# Altium PCB eth_witch.PcbDoc (part 1 of 2)
Units mm, origin at the board's own origin, x right, y up, seen from the top; angles counter-clockwise.
Board outline 80 x 66.5 mm, 4 copper layers (Top Layer, Layer 2, Layer 1, Bottom Layer), stack 1.01 mm thick; 112 components, 94 nets, 442 pads, 468 vias.
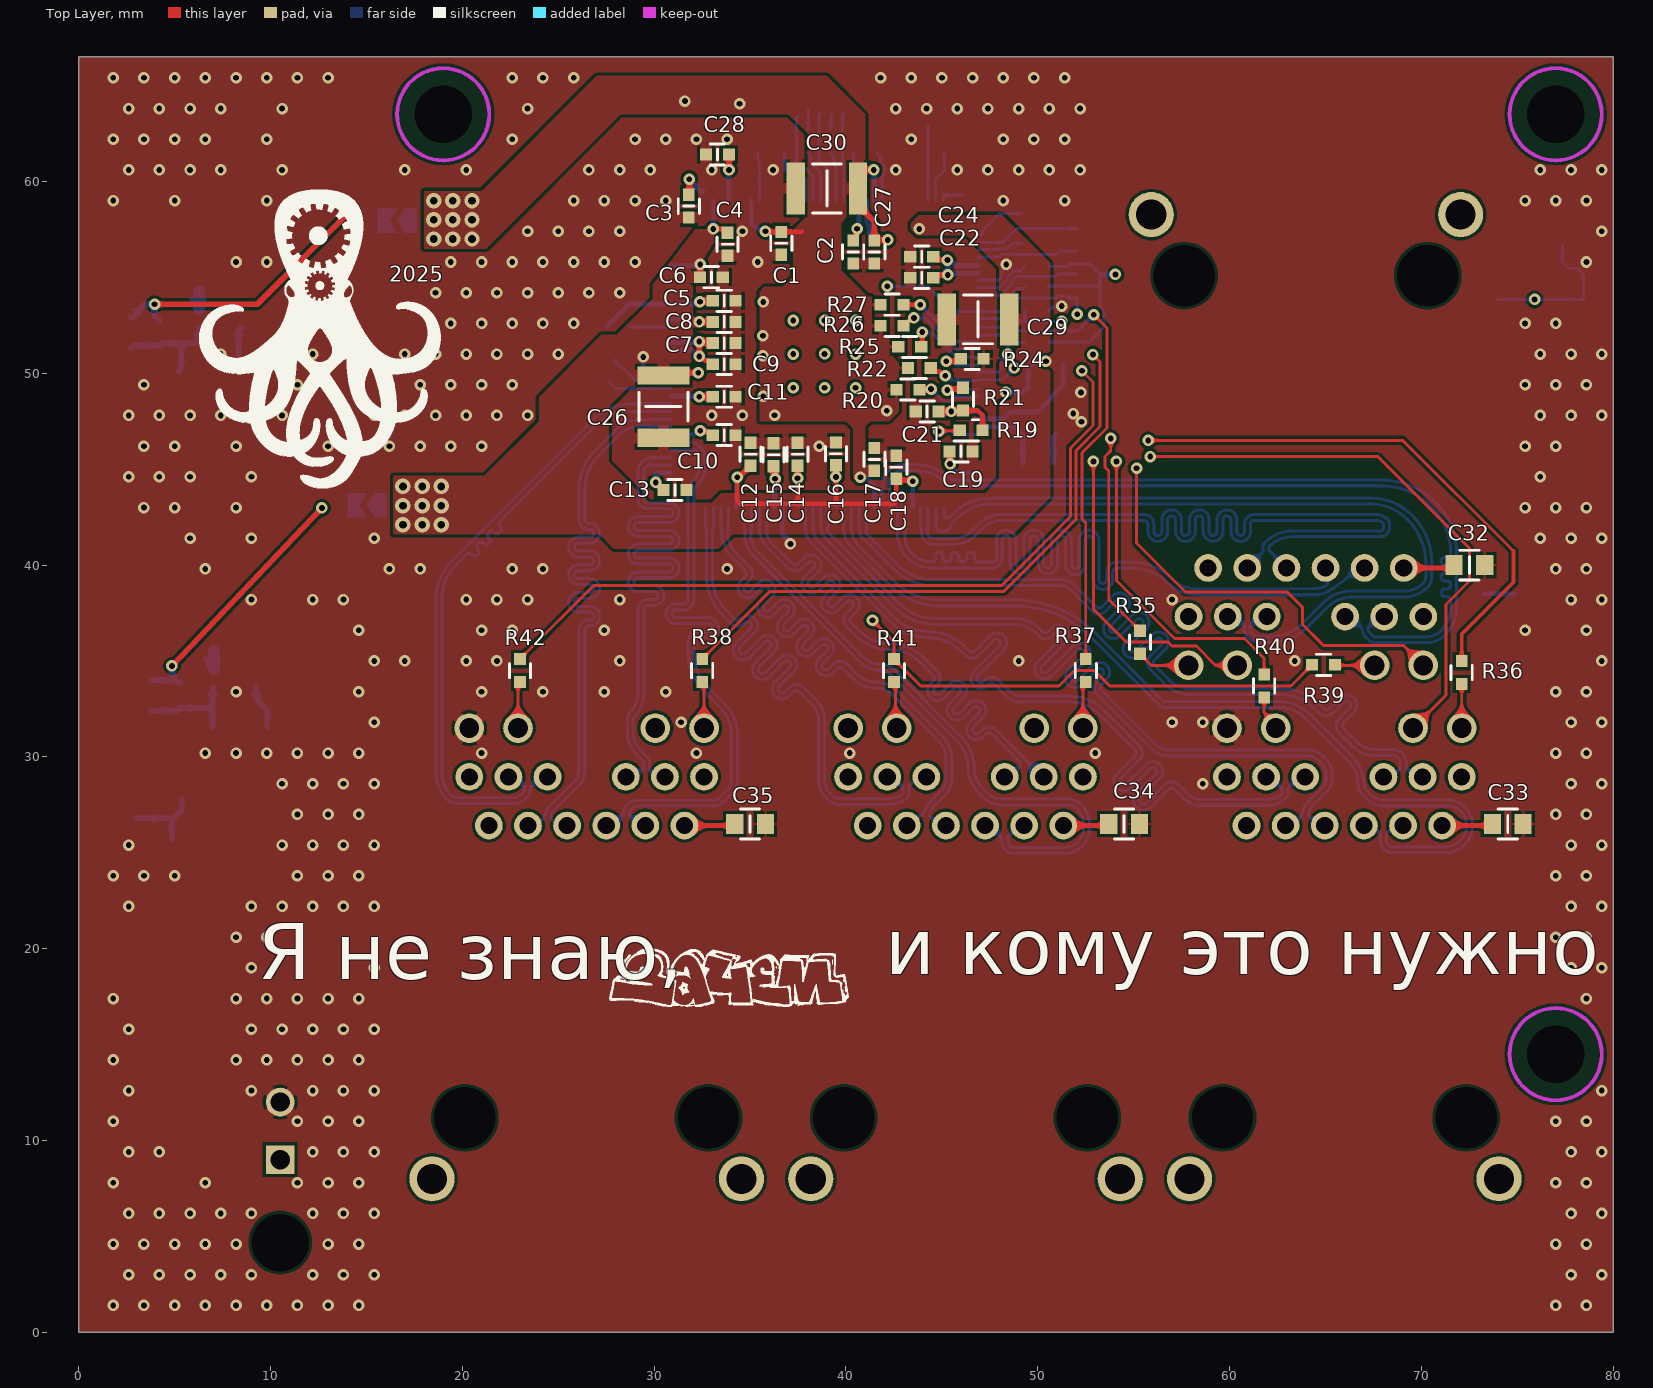
[diagram p0: Top Layer view]
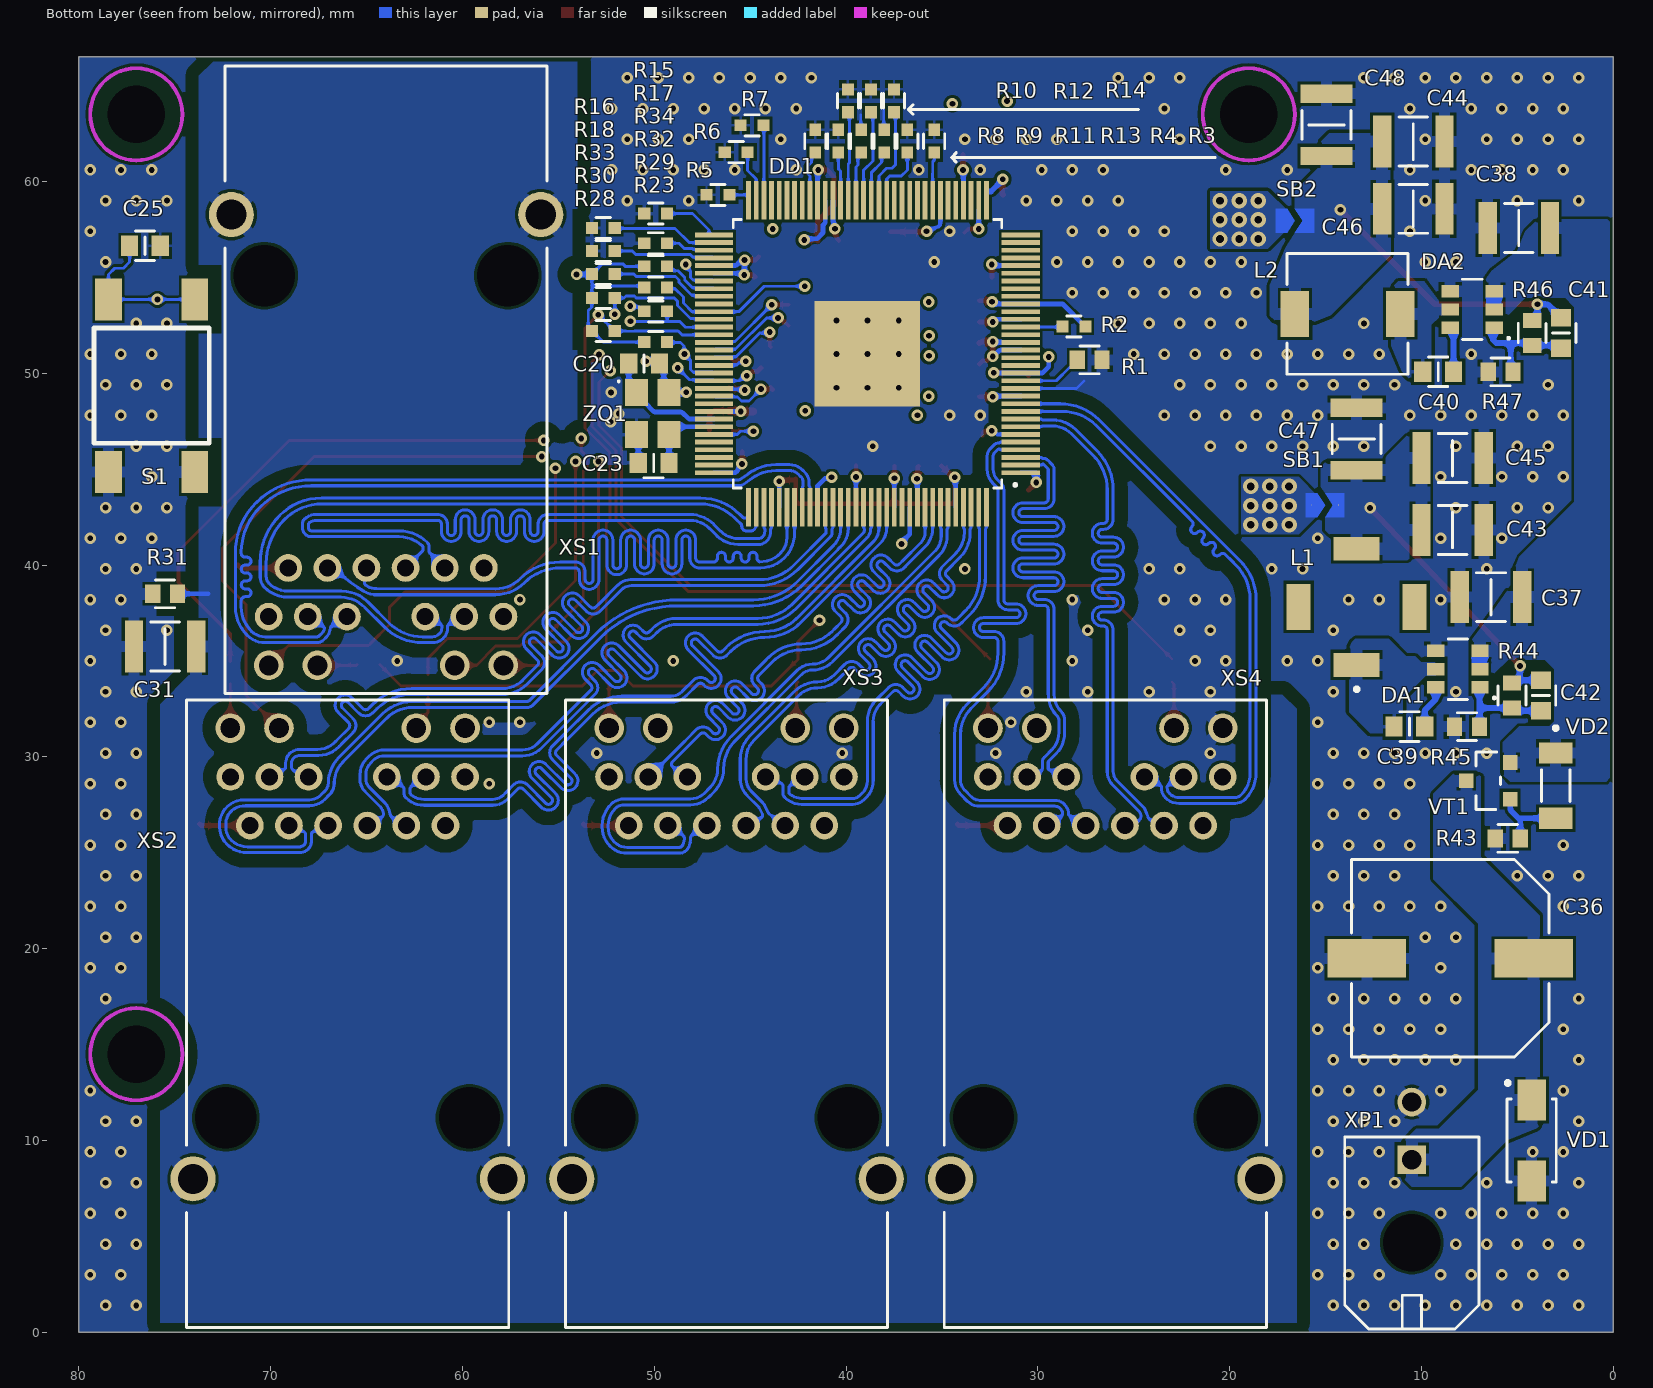
[diagram p1: Bottom Layer view, seen from below]
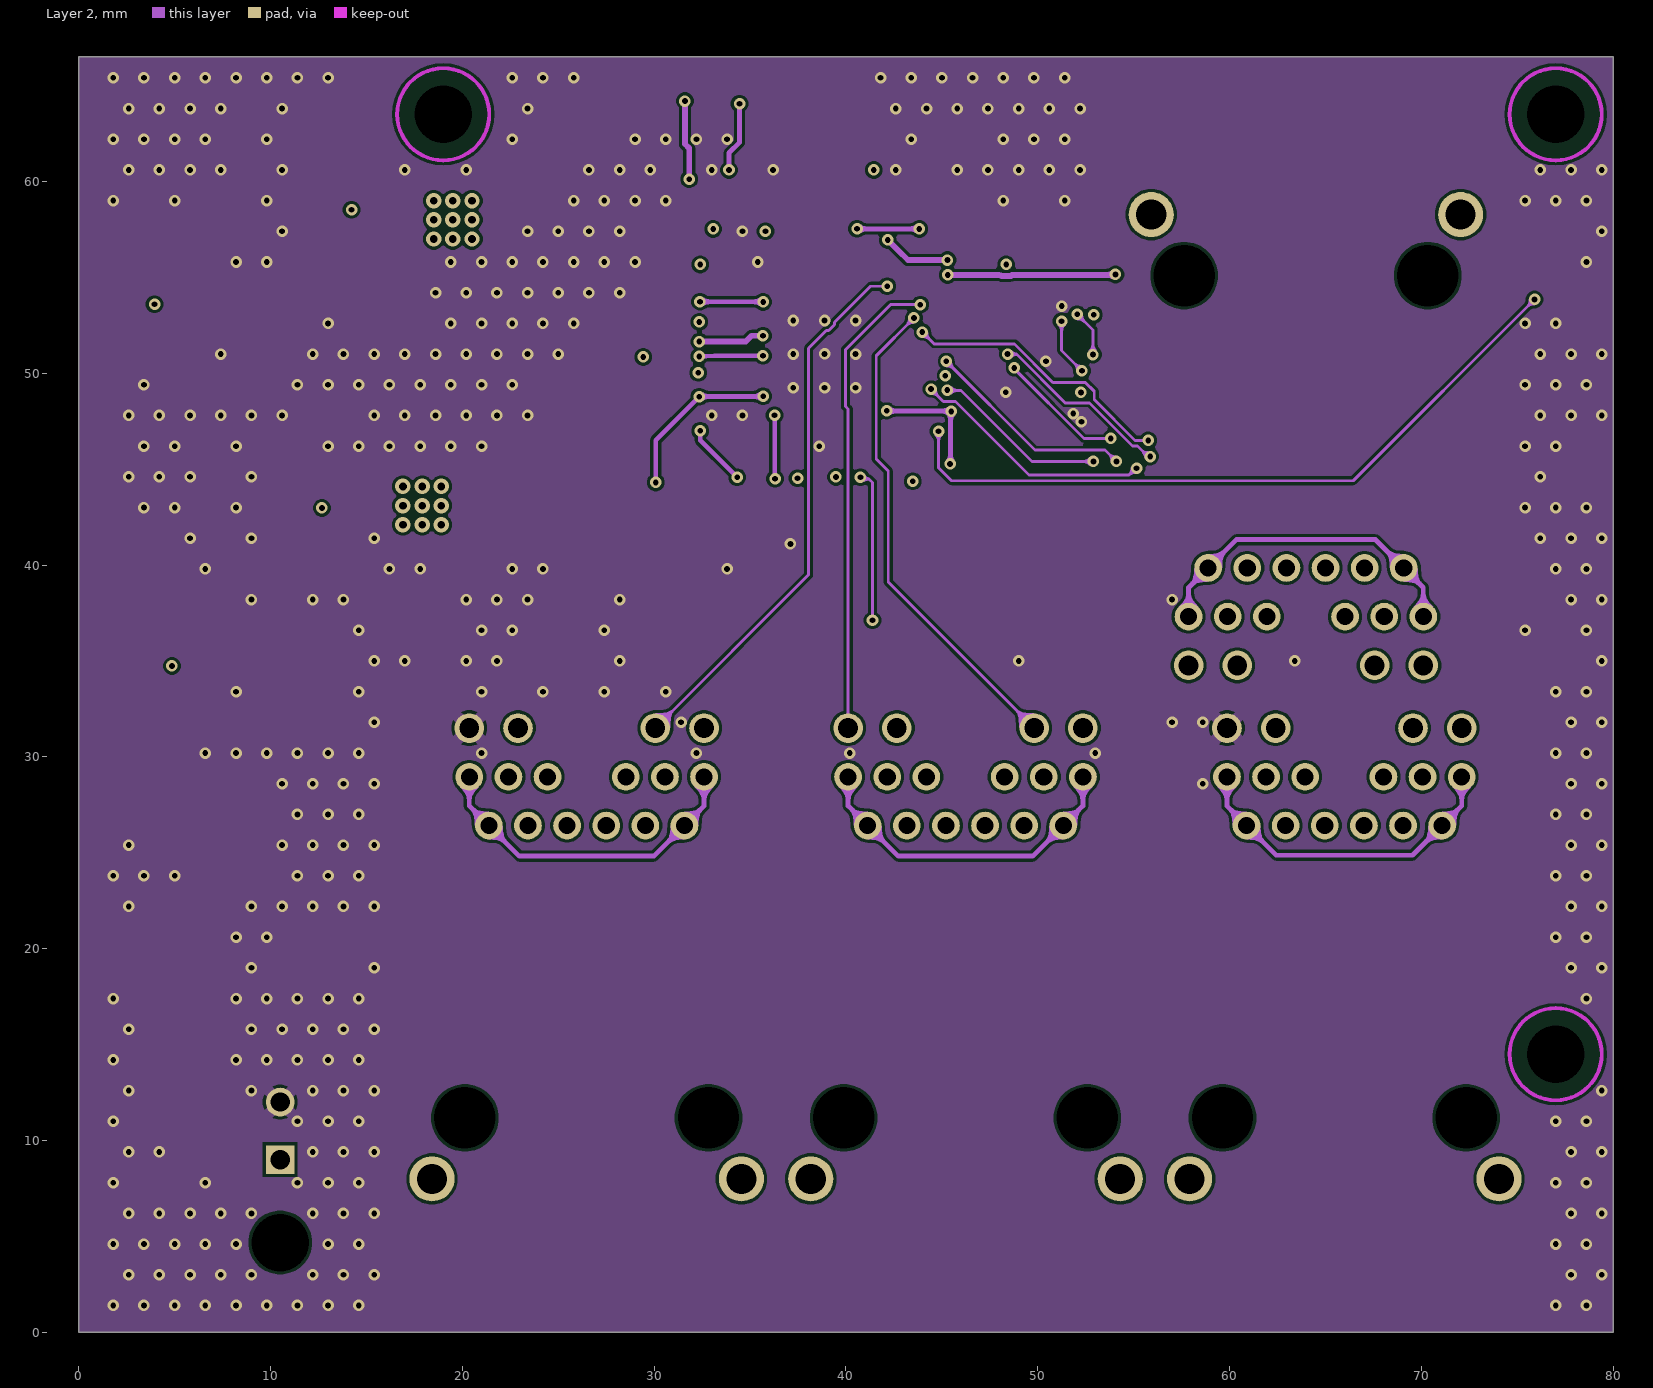
[diagram p2: Layer 2]
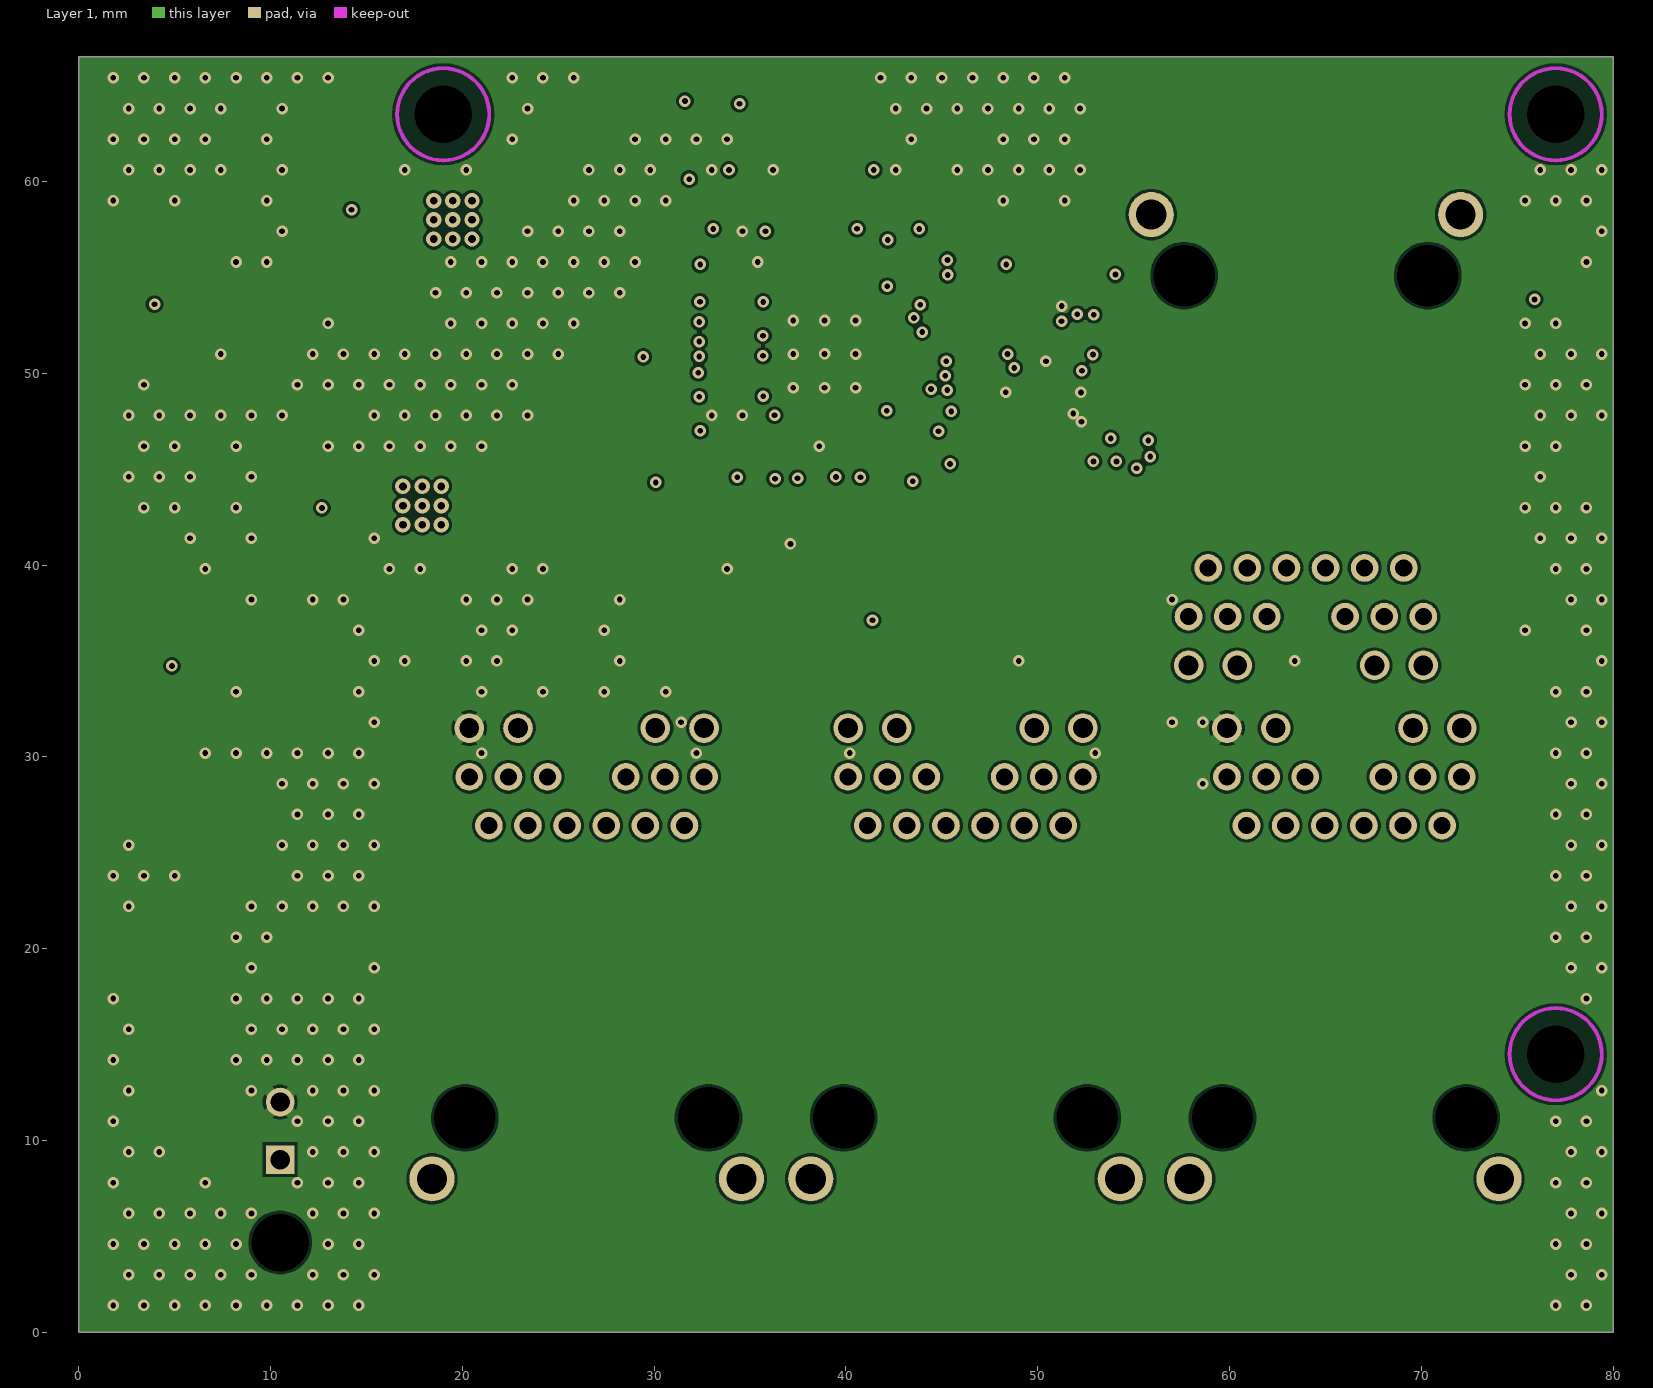
[diagram p3: Layer 1]
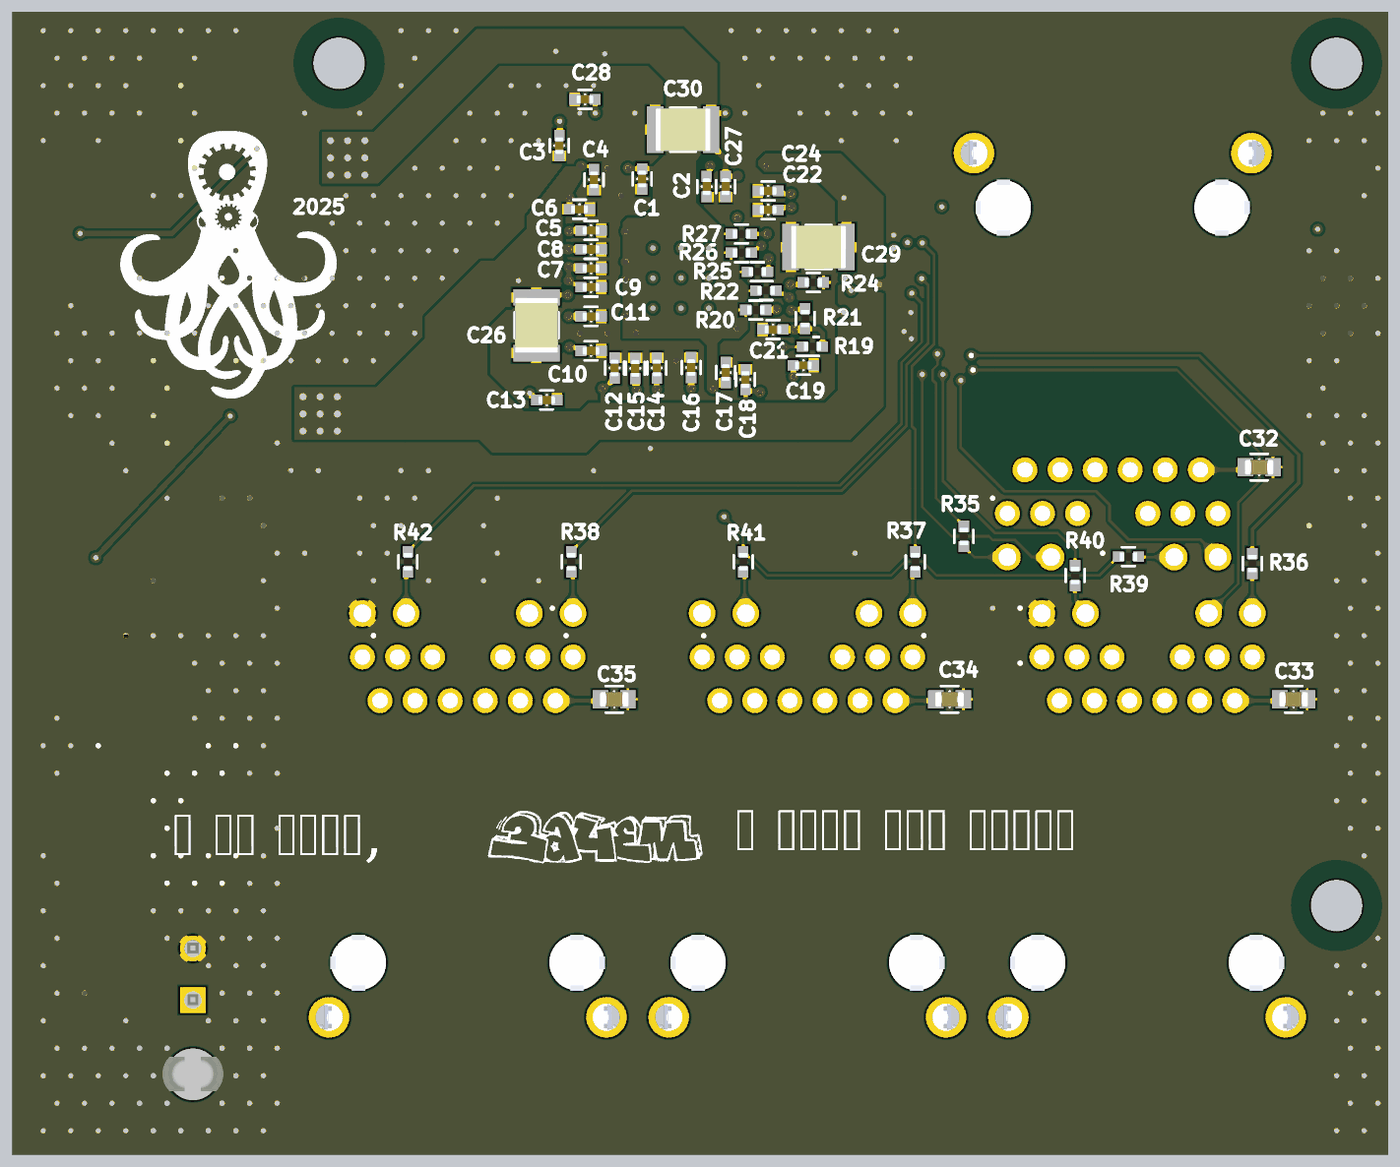
[diagram p5: 3D render of the assembled board from above, using the file's embedded part models]
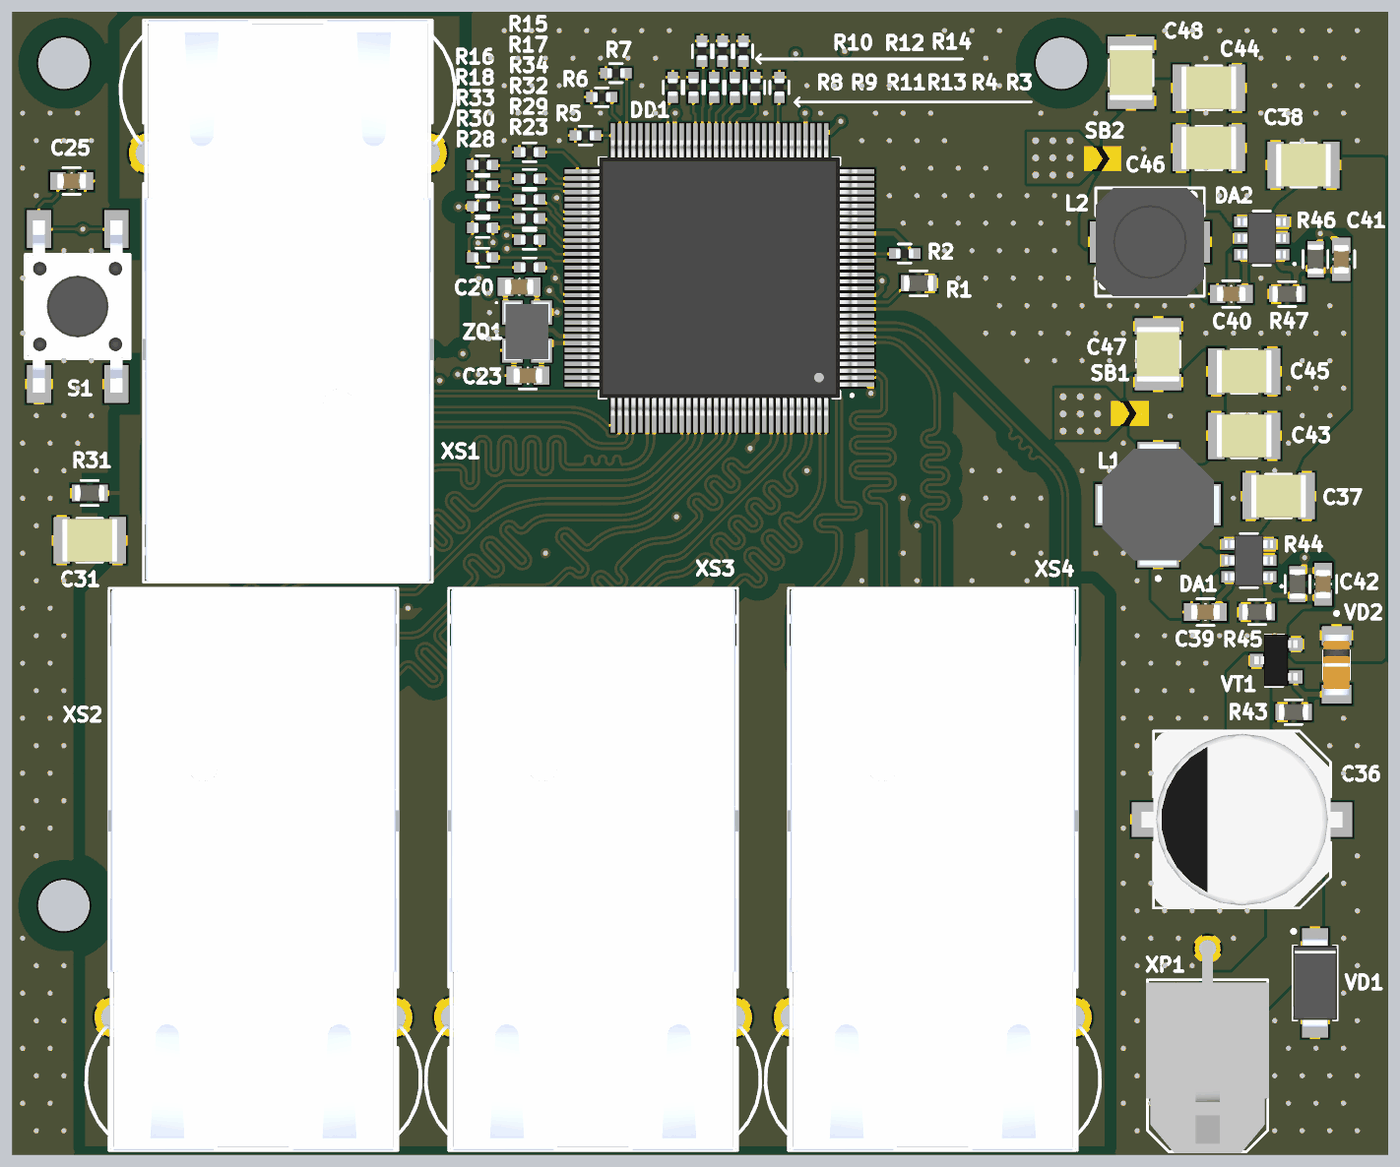
[diagram p6: 3D render of the assembled board from below, using the file's embedded part models]

## Layer stack, top to bottom
Top Solder: solder mask 0.0102, Solder Resist, Dk 3.5
Top Layer: signal copper 0.0175
Dielectric 2: prepreg 0.115, PP-006, Dk 4.2
Layer 2: signal copper 0.0175
Dielectric 1: dielectric 0.71, FR-4, Dk 4.6
Layer 1: signal copper 0.0175
Dielectric 3: prepreg 0.115, PP-006, Dk 4.2
Bottom Layer: signal copper 0.0175
Board Layer Stack Bottom Solder: solder mask 0.0102, Solder Resist, Dk 3.5

## Board outline
0,0 0,66.5 80,66.5 80,0

## Design rules (kind name [scope] priority, off if disabled: settings)
Clearance Clearance_1 [(InNetClass('Port 0') or InNetClass('Port 1') or InNetClass('Port 2') or InNetClass('Port 3') or InNet('GND_ETH')) and not HasFootprint('JK00136NL')] p1: gap=0.15 ignorepadtopadclearanceinfootprint=FALSE except(0.7: Arc-Poly Track-Poly SMDPad-Poly THPad-Poly Via-Poly Fill-Poly Poly-Poly)
Clearance [All] p2: gap=0.15 ignorepadtopadclearanceinfootprint=FALSE
ComponentClearance [All] p1: gap=0.01 collisioncheckmode=3 verticalgap=0.254 showdistances=FALSE
DiffPairsRouting [All] p1: maxlimit=0.4 minlimit=0.1 mostfreqgap=0.4 toplayer_maxgap=0.16 toplayer_prefgap=0.15 toplayer_minwidth=0.157 toplayer_maxwidth=0.158 toplayer_prefwidth=0.158 bottomlayer_maxgap=0.16 bottomlayer_prefgap=0.15 bottomlayer_minwidth=0.157 bottomlayer_maxwidth=0.158 bottomlayer_prefwidth=0.158 impedanceprofiledriven=TRUE impedanceprofileid={DB7D71F1-6594-4B91-9FCC-BB8C32429FCE} impedanceprofilevalue=100.000000 maxuncoupledlength=12.7
HoleSize [All] p1: absolutevalues=TRUE maxlimit=3.2 minlimit=0.3 maxpercent=80.000 minpercent=20.000
MinimumSolderMaskSliver [All] p1: minsoldermaskwidth=0.01
PolygonConnect PolygonConnect_5 [HasFootprint('LQFP128_14x14_exposed_pad')] p1: connectstyle=Direct reliefconductorwidth=0.254 reliefentries=4 polygonreliefangle="90 Angle" airgapwidth=0.254
PolygonConnect PolygonConnect_4 [HasFootprint('0402R') or HasFootprint('0603C') or HasFootprint('X322525MOB4SI')] p2: connectstyle=Relief reliefconductorwidth=0.15 reliefentries=4 polygonreliefangle="90 Angle" conductorbypadedge=TRUE mindistance=0.381 enablemindistance=FALSE airgapwidth=0.15
PolygonConnect PolygonConnect_3 [InNet('NetC39_2') vs HasFootprint('TSOT26')] p3: connectstyle=Direct reliefconductorwidth=0.254 reliefentries=4 polygonreliefangle="90 Angle" airgapwidth=0.254
PolygonConnect PolygonConnect_2 [HasFootprint('0805SB')] p4: connectstyle=Direct reliefconductorwidth=0.254 reliefentries=4 polygonreliefangle="90 Angle" airgapwidth=0.254
PolygonConnect PolygonConnect_1 [InNet('NetC38_2') vs HasFootprint('TSOT26')] p5: connectstyle=Direct reliefconductorwidth=0.254 reliefentries=4 polygonreliefangle="90 Angle" airgapwidth=0.254
PolygonConnect [All] p6: thpad.connectstyle=Relief thpad.reliefconductorwidth=0.6 thpad.reliefentries=4 thpad.polygonreliefangle="90 Angle" thpad.airgapwidth=0.15 thpad.conductorbypadedge=TRUE thpad.mindistance=0.381 thpad.enablemindistance=FALSE smdpad.connectstyle=Relief smdpad.reliefconductorwidth=0.6 smdpad.reliefentries=4 smdpad.polygonreliefangle="90 Angle" smdpad.airgapwidth=0.15 smdpad.conductorbypadedge=TRUE smdpad.mindistance=0.381 smdpad.enablemindistance=FALSE via.connectstyle=Direct via.reliefconductorwidth=0.6 via.reliefentries=4 via.polygonreliefangle="90 Angle" via.airgapwidth=0.15
RoutingVias [All] p1: holewidth=0.3 width=0.6 viastyle="Through Hole" minholewidth=0.3 minwidth=0.6 maxholewidth=0.7 maxwidth=1
SilkToSilkClearance [All] p1: silktosilkclearance=0.05
SilkToSolderMaskClearance [IsPad] p1: minsilkscreentomaskgap=0.1 clearancetoexposedcopper=TRUE
SolderMaskExpansion SolderMaskExpansion_2 [HoleDiameter = 0.4] p1: expansion=0.102 istentingtop=TRUE
SolderMaskExpansion SolderMaskExpansion_1 [HoleDiameter = 0.3] p2: expansion=0.102 istentingtop=TRUE
SolderMaskExpansion [All] p3: expansion=0.102 istentingtop=FALSE
SupplyNets "Schematic Supply Nets_4" [InNet('GND_ETH')] p1: voltage=0.000
SupplyNets "Schematic Supply Nets_3" [InNet('+1.1')] p2: voltage=0.000
SupplyNets "Schematic Supply Nets_2" [InNet('+12')] p3: voltage=0.000
SupplyNets "Schematic Supply Nets_1" [InNet('GND')] p4: voltage=0.000
SupplyNets "Schematic Supply Nets" [InNet('+3.3')] p5: voltage=0.000
Width [All] p1: maxlimit=0.6 minlimit=0.15 preferedwidth=0.15
24 further rules are at their usual default settings.

## Classes and differential pairs
net class Power: +1.1 +3.3
net class "Port 3": P3A_N P3A_P P3B_N P3B_P P3C_N P3C_P P3D_N P3D_P
net class "Port 2": P2A_N P2A_P P2B_N P2B_P P2C_N P2C_P P2D_N P2D_P
net class "Port 1": P1A_N P1A_P P1B_N P1B_P P1C_N P1C_P P1D_N P1D_P
net class "Port 0": P0A_N P0A_P P0B_N P0B_P P0C_N P0C_P P0D_N P0D_P
component class ETH_SWITCH: C1 C2 C3 C4 C5 C6 C7 C8 C9 C10 C11 C12 C13 C14 C15 C16 C17 C18 C19 C20 C21 C22 C23 C24 C25 C26 C27 C28 C29 C30 C31 C32 C33 C34 C35 DD1 R1 R2 R3 R4 R5 R6 R7 R8 R9 R10 R11 R12 R13 R14 R15 R16 R17 R18 R19 R20 R21 R22 R23 R24 R25 R26 R27 R28 R29 R30 R31 R32 R33 R34 R35 R36 R37 R38 R39 R40 R41 R42 S1 XS1 XS2 XS3 XS4 ZQ1
component class dc-dc: C36 C37 C38 C39 C40 C41 C42 C43 C44 C45 C46 C47 C48 DA1 DA2 L1 L2 R43 R44 R45 R46 R47 SB1 SB2 VD1 VD2 VT1 XP1
differential pair P3D: +P3D_P -P3D_N
differential pair P3C: +P3C_P -P3C_N
differential pair P3B: +P3B_P -P3B_N
differential pair P3A: +P3A_P -P3A_N
differential pair P2D: +P2D_P -P2D_N
differential pair P2C: +P2C_P -P2C_N
differential pair P2B: +P2B_P -P2B_N
differential pair P2A: +P2A_P -P2A_N
differential pair P1D: +P1D_P -P1D_N
differential pair P1C: +P1C_P -P1C_N
differential pair P1B: +P1B_P -P1B_N
differential pair P1A: +P1A_P -P1A_N
differential pair P0D: +P0D_P -P0D_N
differential pair P0C: +P0C_P -P0C_N
differential pair P0B: +P0B_P -P0B_N
differential pair P0A: +P0A_P -P0A_N

## Components (designator, comment, footprint, x,y, rotation, side; value= is the part's Value field where it differs from the comment)
C1 "Capacitor" 0402C 36.625,56.775 r90 top value="0,1 мк"
C2 "Capacitor" 0402C 40.375,56.325 r90 top value="0,1 мк"
C3 "Capacitor" 0402C 31.805,58.71 r90 top value="0,1 мк"
C4 "Capacitor" 0402C 33.825,56.725 r90 top value="0,1 мк"
C5 "Capacitor" 0402C 33.65,53.775 r180 top value="0,1 мк"
C6 "Capacitor" 0402C 32.98,55.01 r180 top value="0,1 мк"
C7 "Capacitor" 0402C 33.65,51.575 r180 top value="0,1 мк"
C8 "Capacitor" 0402C 33.65,52.675 r180 top value="0,1 мк"
C9 "Capacitor" 0402C 33.65,50.475 r180 top value="0,1 мк"
C10 "Capacitor" 0402C 33.65,46.775 r180 top value="0,1 мк"
C11 "Capacitor" 0402C 33.65,48.775 r180 top value="0,1 мк"
C12 "Capacitor" 0402C 35.025,45.775 r270 top value="0,1 мк"
C13 "Capacitor" 0402C 31.08,43.91 r180 top value="0,1 мк"
C14 "Capacitor" 0402C 37.475,45.775 r270 top value="0,1 мк"
C15 "Capacitor" 0402C 36.225,45.75 r270 top value="0,1 мк"
C16 "Capacitor" 0402C 39.475,45.8 r270 top value="0,1 мк"
C17 "Capacitor" 0402C 41.48,45.51 r270 top value="0,1 мк"
C18 "Capacitor" 0402C 42.625,45.1 r270 top value="0,1 мк"
C19 "Capacitor" 0402C 46,45.925 r180 top value="0,1 мк"
C20 "GRM1885C1H220J" 0603C 50.525,50.5 r0 bottom value=22п
C21 "Capacitor" 0402C 44.23,48.01 r0 top value="0,1 мк"
C22 "Capacitor" 0402C 43.95,54.975 r0 top value="0,1 мк"
C23 "GRM1885C1H220J" 0603C 50.025,45.325 r0 bottom value=22п
C24 "Capacitor" 0402C 43.95,56.075 r0 top value="0,1 мк"
C25 "Capacitor" 0603C 76.55,56.65 r0 bottom value="0,1 мк"
C26 "Capacitor" 1210C 30.48,48.26 r90 top value="10 мк"
C27 "Capacitor" 0402C 41.475,56.325 r90 top value="0,1 мк"
C28 "Capacitor" 0402C 33.3,61.4 r0 top value="0,1 мк"
C29 "Capacitor" 1210C 46.88,52.81 r0 top value="10 мк"
C30 "Capacitor" 1210C 39.005,59.635 r0 top value="10 мк"
C31 "Capacitor" 1210C 75.5,35.75 r180 bottom value=1н
C32 "Capacitor" 0603C 72.5,40 r0 top value="0,1 мк"
C33 "Capacitor" 0603C 74.5,26.5 r0 top value="0,1 мк"
C34 "Capacitor" 0603C 54.5,26.5 r0 top value="0,1 мк"
C35 "Capacitor" 0603C 35,26.5 r0 top value="0,1 мк"
C36 "Capacitor_polar" ECAP_SMD_10,3x10,3 8.5,19.5 r0 bottom value="470 мк"
C37 "Capacitor" 1210C 6.375,38.325 r180 bottom value="10 мк"
C38 "Capacitor" 1210C 4.925,57.575 r180 bottom value="10 мк"
C39 "Capacitor" 0603C 10.625,31.575 r0 bottom value="0,1 мк"
C40 "Capacitor" 0603C 9.125,50.075 r0 bottom value="0,1 мк"
C41 "Capacitor" 0603C 2.725,52.1 r90 bottom value="100 п"
C42 "Capacitor" 0603C 3.775,33.2 r90 bottom value="100 п"
C43 "Capacitor" 1210C 8.375,41.825 r0 bottom value="22 мк"
C44 "Capacitor" 1210C 10.425,62.075 r0 bottom value="22 мк"
C45 "Capacitor" 1210C 8.375,45.575 r0 bottom value="22 мк"
C46 "Capacitor" 1210C 10.425,58.575 r0 bottom value="22 мк"
C47 "Capacitor" 1210C 13.375,46.575 r270 bottom value="22 мк"
C48 "Capacitor" 1210C 14.95,62.95 r270 bottom value="22 мк"
DA1 "AP63200" TSOT26 8.1,34.575 r90 bottom
DA2 "AP63200" TSOT26 7.35,53.325 r90 bottom
DD1 "RTL8367RB-VB" LQFP128_14x14_exposed_pad 38.88,51.01 r0 bottom
L1 "CDRH6D12NP-2R2NC" CDRH6D12 13.375,37.825 r270 bottom value="2,2 мк"
L2 "B82472G6472M" B82462G4 13.85,53.1 r0 bottom value="4,7 мк"
R1 "RC0603FR-072K49L" 0603R 27.3,50.7 r0 bottom value="2,49 к"
R2 "Resistor" 0402R 28.117,52.432 r0 bottom value="4,7 к"
R3 "Resistor" 0402R 35.4,62.1 r90 bottom value="1,0 к"
R4 "Resistor" 0402R 36.8,62.1 r90 bottom value="1,0 к"
R5 "Resistor" 0402R 46.675,59.3 r180 bottom value="1,0 к"
R6 "Resistor" 0402R 45.725,61.525 r180 bottom value="1,0 к"
R7 "Resistor" 0402R 44.9,62.925 r180 bottom value="1,0 к"
R8 "Resistor" 0402R 41.6,62.1 r270 bottom value="1,0 к"
R9 "Resistor" 0402R 40.4,62.1 r270 bottom value="1,0 к"
R10 "Resistor" 0402R 39.9,64.2 r270 bottom value="1,0 к"
R11 "Resistor" 0402R 39.2,62.1 r270 bottom value="1,0 к"
R12 "Resistor" 0402R 38.7,64.2 r270 bottom value="1,0 к"
R13 "Resistor" 0402R 38,62.1 r270 bottom value="1,0 к"
R14 "Resistor" 0402R 37.5,64.2 r270 bottom value="1,0 к"
R15 "Resistor" 0402R 49.925,58.325 r180 bottom value="1,0 к"
R16 "Resistor" 0402R 52.65,57.575 r180 bottom value="1,0 к"
R17 "Resistor" 0402R 49.925,56.775 r180 bottom value="1,0 к"
R18 "Resistor" 0402R 52.65,56.375 r180 bottom value="1,0 к"
R19 "Resistor" 0402R 46.525,47.025 r0 top value="4,7 к"
R20 "Resistor" 0402R 43.228,49.146 r180 top value="4,7 к"
R21 "Resistor" 0402R 46.1,48.65 r270 top value="4,7 к"
R22 "Resistor" 0402R 43.825,50.275 r180 top value="4,7 к"
R23 "Resistor" 0402R 49.925,51.625 r0 bottom value="4,7 к"
R24 "Resistor" 0402R 46.575,50.75 r180 top value="4,7 к"
R25 "Resistor" 0402R 43.325,51.375 r180 top value="4,7 к"
R26 "Resistor" 0402R 42.4,52.475 r180 top value="4,7 к"
R27 "Resistor" 0402R 42.4,53.575 r180 top value="4,7 к"
R28 "Resistor" 0402R 52.65,52.2 r0 bottom value="4,7 к"
R29 "Resistor" 0402R 49.925,53.225 r180 bottom value="4,7 к"
R30 "Resistor" 0402R 52.65,53.925 r0 bottom value="4,7 к"
R31 "Resistor" 0603R 75.5,38.5 r180 bottom value="1,0 М"
R32 "Resistor" 0402R 49.925,54.475 r0 bottom value="4,7 к"
R33 "Resistor" 0402R 52.65,55.175 r0 bottom value="4,7 к"
R34 "Resistor" 0402R 49.925,55.575 r0 bottom value="4,7 к"
R35 "Resistor" 0402R 55.325,35.975 r270 top value=470
R36 "Resistor" 0402R 72.101,34.396 r270 top value=470
R37 "Resistor" 0402R 52.5,34.5 r270 top value=470
R38 "Resistor" 0402R 32.5,34.5 r270 top value=470
R39 "Resistor" 0402R 64.9,34.8 r0 top value=470
R40 "Resistor" 0402R 61.8,33.7 r270 top value=470
R41 "Resistor" 0402R 42.5,34.5 r270 top value=470
R42 "Resistor" 0402R 23,34.5 r270 top value=470
R43 "Resistor" 0603R 5.5,25.75 r180 bottom value="10 к"
R44 "Resistor" 0603R 5.275,33.2 r90 bottom value=750
R45 "Resistor" 0603R 7.625,31.575 r180 bottom value="2,0 к"
R46 "Resistor" 0603R 4.225,52.1 r90 bottom value="5,6 к"
R47 "Resistor" 0603R 5.875,50.075 r180 bottom value="1,8 к"
S1 "Tact_button" Button_SMD_6x6 76.2,49.35 r270 bottom
SB1 "SB" 0805SB 16.025,42.5 r180 bottom net-tie
SB2 "SB" 0805SB 17.6,57.325 r180 bottom net-tie
VD1 "SMAJ12A" SMA 4.25,10 r270 bottom value="12 В"
VD2 "BZV55-B10" mini_MELF_3.5mm 3,28.5 r270 bottom value="10 В"
VT1 "AO3401A" SOT23-3 6.5,28.75 r0 bottom
XP1 "430450200" MOLEX_MICRO-FIT_430450200 10.5,4.68 r180 bottom
XS1 "JK0-0136NL" JK00136NL 63.98,49.51 r270 bottom
XS2 "JK0-0136NL" JK00136NL 65.98,16.76 r90 bottom
XS3 "JK0-0136NL" JK00136NL 46.23,16.76 r90 bottom
XS4 "JK0-0136NL" JK00136NL 26.48,16.76 r90 bottom
ZQ1 "X322525MOB4SI" X322525MOB4SI 50.075,47.9 r270 bottom value="25 МГц"

## Footprints (in the part's own frame and the unit in brackets; to place one, negate y for a bottom-side part, rotate by r counter-clockwise, add the part's x,y. Pads: shape width x height; smd on the part's side, far side on the other; paste and mask are expansions set on the pad)
0402C [mm]
  rect 0.635x0.61 smd: 1(-0.597,0) 2(0.597,0)
  silkscreen extent -0.38,-0.55 0.38,0.55, body extent -0.51,-0.25 0.51,0.25, height 0.71
0402R [mm]
  rect 0.635x0.61 smd: 1(-0.597,0) 2(0.597,0)
  silkscreen extent -0.38,-0.55 0.38,0.55, body extent -0.5,-0.25 0.5,0.25, height 0.4
0603C [mm] "Chip Resistor, 2-Leads, Body 1,40x0,80mm, IPC Medium Density"
  rect 0.9x1.05 smd: 1(-0.8,0) 2(0.8,0)
  silkscreen extent 0,-0.45 0,0.45, body extent -0.85,-0.45 0.85,0.45, height 0.9
0603R [mm] "Chip Resistor, 2-Leads, Body 1.60x0.85mm, IPC Medium Density"
  rect 0.8x0.95 smd: 1(-0.65,0) 2(0.65,0)
  silkscreen extent -0.5,-0.72 0.5,0.72, body extent -0.87,-0.47 0.88,0.48, height 0.9
0805SB [mm]
  round 0.025 smd: 1(0.3,0.625) 2(1.7,0.625)
  Top Layer region: 1,0 1.4,0.625 1,1.25 2,1.25 2,0 2,0
  Top Layer region: 0.6,1.25 1,0.625 0.6,0 0,0 0,1.25
  body extent 0.4,0 1.7,1.25, height 0.3
1210C [mm]
  rect 0.954x2.706 smd paste+0: 1(-1.625,0) 2(1.625,0)
  silkscreen extent -0.75,-1.28 0.75,1.28, body extent -2.35,-1.6 2.35,1.6, height 0.25
B82462G4 [mm]
  rect 1.5x2.4 smd: 1(-2.75,0) 2(2.75,0)
  silkscreen extent -3.15,-3.15 3.15,3.15, body extent -3.15,-3.15 3.15,3.15, height 3
Button_SMD_6x6 [mm]
  rect 2.2x1.4 smd: 1(-4.5,-2.25) 1(-4.5,2.25) 2(4.5,-2.25) 2(4.5,2.25)
  silkscreen extent -3,-3 3,3, body extent -5,-3 5,3, height 7.1
CDRH6D12 [mm]
  rect 1.25x2.4 smd: 1(3.025,0) 3(-3.025,0)
  rect 2.4x1.25 smd: 2(0,3.025) 4(0,-3.025)
  silkscreen extent 4.2,-0.1 4.4,0.1, body extent -3.52,-3.52 3.52,3.52, height 1.6
ECAP_SMD_10,3x10,3 [mm]
  rect 4.1x2 smd: 1(-4.35,0) 2(4.35,0)
  silkscreen extent -5.15,-5.15 5.15,5.15, body extent -5.85,-5.15 5.85,5.15, height 10.21
JK00136NL [mm]
  round 2.355 hole 1.57: 0(-8.76,-8.065) 0(-8.76,8.065)
  round 1.446 hole 0.89: 1(9.66,-5.1) 2(9.66,-3.06) 3(9.66,-1.02) 4(9.66,1.02) 5(9.66,3.06) 6(9.66,5.1) 7(12.2,-6.12) 8(12.2,-4.08) 9(12.2,-2.04) 10(12.2,2.04) 11(12.2,4.08) 12(12.2,6.12)
  round 1.545 hole 1.03: 13(14.74,-6.12) 14(14.74,-3.58) 15(14.74,3.58) 16(14.74,6.12)
  round 0 hole 3.2 unplated mask+1.7: 17(-5.58,6.35) 18(-5.58,-6.35)
  silkscreen extent -16.51,-8.39 16.2,8.39, body extent -16.51,-9.84 16.18,9.84, height 15.04
LQFP128_14x14_exposed_pad [mm]
  rect 2x0.25 smd: 1(-8,6.2) 2(-8,5.8) 3(-8,5.4) 4(-8,5) 5(-8,4.6) 6(-8,4.2) 7(-8,3.8) 8(-8,3.4) 9(-8,3) 10(-8,2.6) 11(-8,2.2) 12(-8,1.8) 13(-8,1.4) 14(-8,1) 15(-8,0.6) 16(-8,0.2) 17(-8,-0.2) 18(-8,-0.6) 19(-8,-1) 20(-8,-1.4) 21(-8,-1.8) 22(-8,-2.2) 23(-8,-2.6) 24(-8,-3) 25(-8,-3.4) 26(-8,-3.8) 27(-8,-4.2) 28(-8,-4.6) 29(-8,-5) 30(-8,-5.4) 31(-8,-5.8) 32(-8,-6.2) 65(8,-6.2) 66(8,-5.8) 67(8,-5.4) 68(8,-5) 69(8,-4.6) 70(8,-4.2) 71(8,-3.8) 72(8,-3.4) 73(8,-3) 74(8,-2.6) 75(8,-2.2) 76(8,-1.8) 77(8,-1.4) 78(8,-1) 79(8,-0.6) 80(8,-0.2) 81(8,0.2) 82(8,0.6) 83(8,1) 84(8,1.4) 85(8,1.8) 86(8,2.2) 87(8,2.6) 88(8,3) 89(8,3.4) 90(8,3.8) 91(8,4.2) 92(8,4.6) 93(8,5) 94(8,5.4) 95(8,5.8) 96(8,6.2)
  rect 0.25x2 smd: 33(-6.2,-8) 34(-5.8,-8) 35(-5.4,-8) 36(-5,-8) 37(-4.6,-8) 38(-4.2,-8) 39(-3.8,-8) 40(-3.4,-8) 41(-3,-8) 42(-2.6,-8) 43(-2.2,-8) 44(-1.8,-8) 45(-1.4,-8) 46(-1,-8) 47(-0.6,-8) 48(-0.2,-8) 49(0.2,-8) 50(0.6,-8) 51(1,-8) 52(1.4,-8) 53(1.8,-8) 54(2.2,-8) 55(2.6,-8) 56(3,-8) 57(3.4,-8) 58(3.8,-8) 59(4.2,-8) 60(4.6,-8) 61(5,-8) 62(5.4,-8) 63(5.8,-8) 64(6.2,-8) 97(6.2,8) 98(5.8,8) 99(5.4,8) 100(5,8) 101(4.6,8) 102(4.2,8) 103(3.8,8) 104(3.4,8) 105(3,8) 106(2.6,8) 107(2.2,8) 108(1.8,8) 109(1.4,8) 110(1,8) 111(0.6,8) 112(0.2,8) 113(-0.2,8) 114(-0.6,8) 115(-1,8) 116(-1.4,8) 117(-1.8,8) 118(-2.2,8) 119(-2.6,8) 120(-3,8) 121(-3.4,8) 122(-3.8,8) 123(-4.2,8) 124(-4.6,8) 125(-5,8) 126(-5.4,8) 127(-5.8,8) 128(-6.2,8)
  rect 5.5x5.5 smd: 129(0,0)
  silkscreen extent -7.78,-7 7,7, body extent -8,-8 8,8, height 1.6
mini_MELF_3.5mm [mm]
  rect 1.11x1.73 smd: 1(1.705,0) 2(-1.705,0)
  silkscreen extent -3.1,-0.75 0.83,0.75, body extent -1.75,-0.8 1.75,0.8, height 1.59
MOLEX_MICRO-FIT_430450200 [mm] "Molex MicroFit 3.0 2 pin connector"
  round 0 hole 3 unplated mask+1.6: 0(0,0)
  rect 1.5x1.5 hole 1: 1(0,4.32)
  round 1.5 hole 1: 2(0,7.32)
  silkscreen extent -3.5,-4.5 3.5,5.5, body extent -3.57,-4.57 3.58,7.67, height 8.93
SMA [mm]
  rect 2.12x1.5 smd: 1(2.115,0) 2(-2.115,0)
  silkscreen extent -3.1,-1.35 2.16,1.28, body extent -2.57,-1.28 2.57,1.28, height 2.5
SOT23-3 [mil]
  rect 30x30 smd: 1(-44.29,37.4) 2(-44.29,-37.6) 3(45.71,-0.1)
  silkscreen extent -25,-59 26,59, body extent -48,-60 50,59, height 41
TSOT26 [mm]
  rect 0.645x0.9 smd: 1(-0.95,-1.15) 2(0,-1.15) 3(0.95,-1.15) 4(0.95,1.15) 5(0,1.15) 6(-0.95,1.15)
  silkscreen extent -1.58,-1.95 1.57,0.5, body extent -1.5,-1.4 1.5,1.4, height 1.01
X322525MOB4SI [mm]
  rect 1.4x1.2 smd: 1(-1.1,-0.85) 2(1.1,-0.85) 3(1.1,0.85) 4(-1.1,0.85)
  silkscreen extent -1.73,-1.82 -1.63,-1.73, body extent -1.68,-1.33 1.68,1.33, height 0.9

## Part data
C1 C2 C3 C4 C5 C6 C7 C8 C9 C10 C11 C12 C13 C14 C15 C16 C17 C18 C19 C21 C22 C24 C27 C28: library part Capacitor_0,1u_10_16V_X7R_0603C, "Конденсатор 0402C ёмкостью 0,1 мк 10%, 16 В, X7R", Capacity (nF)=100, Dielectric=X7R, Tolerance=10%, Voltage (V)=16, Part Number=Capacitor_0,1u_10_16V_X7R_0603C, Автор=rreali
C20 C23: "Конденсатор 0603C ёмкостью 22п 5%, 50 В, NP0", Capacity (nF)=0,022, Dielectric=NP0, Tolerance=5%, Voltage (V)=50, Datasheet=https://cdn.promelec.ru/upload/items/2020/02/18/MURATA_MLCC_catalog_C02E_short_.pdf, Part Number=GRM1885C1H220J, Автор=rreali
C25 C32 C33 C34 C35: library part Capacitor_0,1u_10_50V_X7R_0603C, "Конденсатор 0603C ёмкостью 0,1 мк 10%, 50 В, X7R", Capacity (nF)=100, Dielectric=X7R, Tolerance=10%, Voltage (V)=50, Part Number=Capacitor_0,1u_10_50V_X7R_0603C
  C32 C33 C34 C35: Library Path2=Schematic\Capacitor.SchLib
C26 C29 C30 C37 C38: library part Capacitor_10u_10_35V_X7R_1210C, "Конденсатор 1210C ёмкостью 10 мк 10%, 35 В, X7R", Capacity (nF)=10000, Dielectric=X7R, Tolerance=10%, Voltage (V)=35, Part Number=Capacitor_10u_10_35V_X7R_1210C
C31: library part Capacitor_1n_10_1000V_X7R_1206C, "Конденсатор 1210C ёмкостью 1н 10%, 1000 В, X7R", Capacity (nF)=1, Dielectric=X7R, Tolerance=10%, Voltage (V)=1000, Datasheet=https://static.chipdip.ru/lib/245/DOC027245978.pdf, Part Number=Capacitor_1n_10_1000V_X7R_1206C, Автор=rreali
C36: library part CK016M471G10PKKKV00R, "Конденсатор алюминиевый электролитический 470мкФ 16В ±20% (10х10)мм SMD 460мА 2000часов 105°C", Capacity (uF)=470, Tolerance=20, Voltage (V)=16, Datasheet=https://cdn.promelec.ru/upload/items/2023/12/25/suscon-ck.pdf, Part Number=CK016M471G10PKKKV00R, Type="SMD Aluminum", Автор=rreali
C39 C40: library part Capacitor_0,1u_10_50V_X7R_0603C, "Конденсатор", Capacity (nF)=100, Dielectric=X7R, Tolerance=0,1, Voltage (V)=50, Library Path2=Schematic\Capacitor.SchLib, Part Number=Capacitor_0,1u_10_50V_X7R_0603C
C41 C42: library part Capacitor_100p_10_50V_X7R_0603C, "Конденсатор 0603C ёмкостью 100 п 10%, 50 В, X7R", Capacity (nF)=0,1, Dielectric=X7R, Tolerance=10%, Voltage (V)=50, Part Number=Capacitor_100p_10_50V_X7R_0603C
C43 C44 C45 C46 C47 C48: library part Capacitor_22u_10_25V_X7R_1210C, "Конденсатор 1210C ёмкостью 22 мк 10%, 25 В, X7R", Capacity (nF)=22000, Dielectric=X7R, Tolerance=10%, Voltage (V)=25, Part Number=Capacitor_22u_10_25V_X7R_1210C
DA1 DA2: "DC-DC понижающий преобразователь, Vin: 3.8 - 40 В, adj, 2 А", Part Number=AP63200
DD1: "Управляемый коммутатор второго уровня на 5+2 порта 10/100/1000M", PACKAGE=None, Check_prices=https://www.snapeda.com/parts/RTL8367RB/Realtek/view-part/?ref=eda, Datasheet=https://static.chipdip.ru/lib/518/DOC041518607.pdf, MF=Realtek, MP=RTL8367RB, Part Number=RTL8367RB-VB, SnapEDA_Link=https://www.snapeda.com/parts/RTL8367RB/Realtek/view-part/?ref=snap, Автор=rreali
L1: "Индуктивность на 2,2 мкГн, номинальный ток 2,5 А", Current="2,5 А", Inductance (μH)=2,2, Part Number=CDRH6D12NP-2R2NC, Автор=rreali
L2: "Индуктивность на 4,7 мкГн, номинальный ток 2,5 А", Current="2,5 А", Inductance (μH)=4,7, Part Number=B82472G6472M, Автор=rreali
R1: "0.1Вт 0603 2.49 кОм, 1%, Чип резистор", Tolerance=1%, Part Number=RC0603FR-072K49L, Автор=rreali
R2 R19 R20 R21 R22 R23 R24 R25 R26 R27 R28 R29 R30 R32 R33 R34: library part Resistor_4.7k_1_0402, "Резистор номиналом 4,7 кОм 1%", Tolerance=1%, Part Number=Resistor_4.7k_1_0402, Автор=rreali
R3 R4 R5 R6 R7 R8 R9 R10 R11 R12 R13 R14 R15 R16 R17 R18: library part Resistor_1.0k_1_0402, "Резистор номиналом 1,0 кОм 1%", Tolerance=1%, Part Number=Resistor_1.0k_1_0402, Автор=rreali
R31: library part Resistor_1.0M_1_0603, "Резистор номиналом 1,0 МОм 1%", Tolerance=1%, Part Number=Resistor_1.0M_1_0603
R35 R36 R37 R38 R39 R40 R41 R42: library part Resistor_470_1_0402, "Резистор номиналом 470 Ом 1%", Tolerance=1%, Part Number=Resistor_470_1_0402, Автор=rreali
R43: library part Resistor_10k_1_0603, "Резистор номиналом 10 кОм 1%", Tolerance=1%, Part Number=Resistor_10k_1_0603
R44: library part Resistor_750_1_0603, "Резистор номиналом 750 Ом 1%", Tolerance=1%, Part Number=Resistor_750_1_0603
R45: library part Resistor_2.0k_1_0603, "Резистор номиналом 2,0 кОм 1%", Tolerance=1%, Part Number=Resistor_2.0k_1_0603
R46: library part Resistor_5.6k_1_0603, "Резистор номиналом 5,6 кОм 1%", Tolerance=1%, Part Number=Resistor_5.6k_1_0603
R47: library part Resistor_1.8k_1_0603, "Резистор номиналом 1,8 кОм 1%", Tolerance=1%, Part Number=Resistor_1.8k_1_0603
S1: "Тактовая кнопка", Part Number=Tact_button
SB1 SB2: "Solder bridge, мост припоя, запаиваемая перемычка, net tie, jumper", Part Number=SB, Автор=rreali
VD1: "Защитный диод на 12 В, рассеиваемая мощность 400 Вт", Power (W)=400, Voltage (V)=12, Part Number=SMAJ12A, Автор=rreali
VD2: "Стабилитрон 10В, 2%, 0.5Вт", Current="5 мА", Power (W)=0.5, Voltage (V)=10, Accuracy=0,02, Datasheet=https://cdn.promelec.ru/upload/datasheet/b/7/BZV55_SER.pdf, Part Number=BZV55-B10, Автор=rreali
VT1: "P-канальный MOSFET", Part Number=AO3401A
XP1: "Разъем типа провод-плата, угловой, 3 мм, 2 контакт(-ов), Штыревой Разъем, Серия Micro-Fit для монтажа в отверстия", Value1="+5...12 В", Value2=Общий, Datasheet=https://www.molex.com/content/dam/molex/molex-dot-com/products/automated/en-us/salesdrawingpdf/430/43045/430450200_sd.pdf?inline, Part Number=430450200, System=Connector, Автор=rreali
XS1 XS2 XS3 XS4: "Модульный разъем (с трансформатором) Cat5/6, RJ45, Гнездо,  1 порт", PACKAGE=None, Availability=Good, Datasheet=https://static.chipdip.ru/lib/746/DOC044746386.pdf, DigiKey-Purchase-URL=https://snapeda.com/shop?store=DigiKey&id=195579, MF="Pulse Electronics", Mouser-Purchase-URL=https://snapeda.com/shop?store=Mouser&id=195579, MP=JK0-0136NL, Part Number=JK0-0136NL, Price=None, SnapEDA_Link=https://www.snapeda.com/parts/JK0-0136NL/Pulse%20Electronics%20Network/view-part/195579/?ref=snap, System=Connector, Автор=rreali
ZQ1: "Кварцевый резонатор SMD 25 МГц ±10ppm SMD-3225_4P", Datasheet=https://datasheet.lcsc.com/lcsc/Yangxing-Tech-X322525MOB4SI_C9006.pdf, Part Number=X322525MOB4SI, Автор=rreali

## Free pads (board coordinates)
  round 0 hole 3 unplated mask+1.6: 2(19,63.5) 2(77,14.5) 2(77,63.5)

## Via types
v1: diameter 0.6, hole 0.3, Top Layer to Bottom Layer, tented both sides, 450 vias
v2: diameter 0.8, hole 0.4, Top Layer to Bottom Layer, tented both sides, 18 vias

## Nets (pads, with @x,y where several pads share a name; then routed paths per layer and width w, separated by ;. In a path a pad name is that pad's centre, name@x,y a point inside that pad or via, vN(x,y) a via of type N, cw(c..) or ccw(c..) an arc to the next point about the centre after c; other vN are vias at no path point)
+1.1: C2.2 C4.2 C6.2 C8.2 C10.2 C12.2 C14.2 C16.2 C18.2 C26.2 C29.2 DD1.6 DD1.14 DD1.21 DD1.28 DD1.34 DD1.53 DD1.71 DD1.101 DD1.111 DD1.116 DD1.124 SB1.1 | length 47.2
  Top Layer w0.2: v1(32.4,47) 32.835,46.98 C10.2@32.883,46.76 ; v1(33.075,57.525) 33.527,57.533 cw(c33.531,57.333) 33.546,57.533 33.62,57.527 C4.2@33.825,57.322 ; v1(37.475,44.525) C14.2@37.475,45.178 ; 39.475,43.225 39.5,43.2 ; v1(39.475,44.591) C16.2@39.475,45.203
  Top Layer w0.25: C26.2@30.48,49.885 30.62,50.025 32.138,50.025 32.19,49.974 v1@32.19,49.924 ; v1(32.35,52.675) C8.2@33.053,52.675 ; C6.2@32.383,55.01 32.392,55.019 32.392,55.667 v1(32.4,55.675) ; C12.2@35.025,45.178 35.025,45.166 34.82,44.961 34.807,44.961 34.422,44.575 v1(34.325,44.575) 34.325,43.346 34.471,43.2 37.5,43.2 ; v1(37.475,44.525) 37.5,44.5 37.5,43.2 ; 39.475,43.225 v1(39.475,44.591) ; C2.2@40.375,56.922 ccw(c39.888,57.409) 40.577,57.409 v1(40.577,57.532) ; v1(43.48,44.366) 43.413,44.433 42.695,44.433 C18.2@42.625,44.503 42.625,43.346 42.479,43.2 39.5,43.2 37.5,43.2
  Layer 2 w0.25: v1(32.4,47) 32.4,46.5 v1(34.325,44.575) ; v1(40.577,57.532) 40.583,57.525 v1(43.825,57.525)
  Bottom Layer w0.15: DD1.71@46.88,54.81 46.93,54.86 47.973,54.86 48.105,54.992 48.105,55.308 48.35,55.553 v1(48.35,55.675)
  Bottom Layer w0.2: DD1.6@30.88,46.81 32.102,46.81 32.292,47 v1(32.4,47) ; v1(33.075,57.525) 33.086,57.642 ccw(c32.887,57.661) 33.087,57.661 33.087,58.11 DD1.34@33.08,59.01 ; DD1.116@37.48,43.01 v1@37.48,44.26 ; DD1.111@39.48,43.01 v1@39.48,44.301
  Bottom Layer w0.25: v1(29.43,50.85) 29.43,50.346 29.766,50.01 DD1.14@30.88,50.01 32.285,50.01 v1(32.3,50.025) ; DD1.21@30.88,52.81 32.12,52.81 32.255,52.675 v1(32.35,52.675) ; DD1.28@30.88,55.61 32.335,55.61 v1(32.4,55.675) ; DD1.124@34.28,43.01 34.28,44.01 cw(c34.555,44.01) 34.281,44.032 v1(34.325,44.575) ; v1(40.577,57.532) 40.673,57.947 ccw(c40.405,58.01) 40.68,58.01 40.68,58.135 DD1.53@40.68,59.01 ; DD1.101@43.48,43.01 v1(43.48,44.366)
  other v2: 16.9,42.1 17.9,42.1 18.9,42.1 16.9,43.1 17.9,43.1 18.9,43.1 16.9,44.1 17.9,44.1 18.9,44.1
+3.3: C1.2 C3.2 C5.2 C7.2 C9.2 C11.2 C13.2 C15.2 C17.2 C19.2 C21.2 C22.2 C24.2 C27.2 C28.2 C30.2 DD1.1 DD1.11 DD1.17 DD1.18 DD1.23 DD1.33 DD1.36 DD1.39 DD1.54 DD1.55 DD1.69 DD1.70 DD1.88 DD1.96 DD1.106 DD1.119 R2.1 R19.2 R20.2 R21.2 R22.2 R23.2 R25.2 R26.2 R27.2 R28.2 R30.2 R32.2 R33.2 R34.2 R39.1 R41.1 SB2.1 | length 144.9
  Top Layer w0.15: v1(41.382,37.118) 42.5,36 R41.1@42.5,35.097 42.5,35.084 42.73,34.854 42.742,34.854 43.897,33.7 51.1,33.7 51.9,34.5 52.95,34.5 53.75,33.7 63.203,33.7 R39.1@64.303,34.8
  Top Layer w0.25: v1(30.08,44.31) 30.08,44.301 30.471,43.91 C13.2@30.483,43.91 ; v1(32.35,48.775) C11.2@33.053,48.775 ; v1(32.354,51.649) v1(32.35,50.875) 32.633,50.687 cw(c32.494,50.479) 32.671,50.655 32.87,50.655 C9.2@33.05,50.475 ; v1(32.384,53.732) 32.427,53.775 C5.2@33.053,53.775 ; C28.2@33.897,61.4 33.898,61.398 33.898,60.602 v1(33.9,60.6) ; v1(35.8,57.4) 35.925,57.376 ccw(c35.971,57.622) 35.971,57.372 C1.2@36.625,57.372 37.687,57.372 ; C15.2@36.225,45.153 36.263,45.116 36.263,44.538 v1(36.3,44.5) ; C30.2@40.63,59.635 40.63,60.248 40.982,60.6 v1(41.45,60.6) ; C27.2@41.475,56.922 41.489,56.936 42.161,56.936 v1(42.175,56.95) ; C24.2@44.547,56.075 44.74,55.905 v1(45.288,55.898) ; C19.2@45.414,45.914 45.414,45.286 v1(45.425,45.275) ; v1(45.485,48.01) v1@45.506,48.031 ; R21.2@46.078,48.031 R21.2@46.1,48.053 46.872,48.053 47.122,47.803 R19.2@47.122,47.025
  Top Layer w0.3: C3.2@31.805,59.307 31.852,59.354 31.852,59.978 v1@31.9,60.025 ; v1(32.354,51.649) 32.885,51.649 C7.2@33.053,51.575 ; C30.2@40.63,59.635 40.63,58.759 41.475,57.914 C27.2@41.475,56.922 ; C22.2@44.772,55.025 44.785,55.038 cw(c44.997,54.825) 44.997,55.125 v1(45.3,55.125)
  Top Layer w0.4: C21.2@44.827,48.01 v1(45.485,48.01) ; v1@45.506,48.031 R21.2@46.078,48.031
  Layer 2 w0.15: v1(40.75,44.575) 40.836,44.489 41.189,44.489 41.382,44.297 v1(41.382,37.118)
  Layer 2 w0.25: v1(30.08,44.31) 30.08,46.505 v1(32.35,48.775) 32.362,48.787 35.668,48.787 v1(35.68,48.8) ; v1(32.35,50.875) 33.138,50.912 cw(c33.15,50.662) 33.15,50.912 v1(35.668,50.912) ; v1(32.384,53.732) 32.39,53.726 35.674,53.726 v1(35.68,53.719) ; v1(33.9,60.6) 33.9,61.487 34.45,62.037 v1(34.45,64.05) ; v1(36.275,47.81) 36.288,47.797 36.288,44.512 v1(36.3,44.5) ; v1@42.135,48.01 42.155,48.03 45.465,48.03 v1(45.485,48.01) 45.45,47.975 45.45,45.3 v1(45.425,45.275)
  Layer 2 w0.3: v1(31.602,64.193) 31.6,64.191 31.6,61.951 31.826,61.725 v1(31.826,60.12) ; v1(32.354,51.649) 34.769,51.649 35.079,51.959 v1(35.669,51.959) ; v1(42.175,56.95) 42.708,56.417 43.227,55.898 v1(45.288,55.898) ; v1(45.3,55.125) 47.937,55.125 cw(c47.936,54.825) 48.101,55.075 48.599,55.075 48.649,55.125 54.025,55.125 v1(54.05,55.15)
  Bottom Layer w0.15: R23.2@50.522,51.625 52.659,51.625 53.234,52.2 R28.2@53.247,52.2 53.441,52.394 53.441,53.267 53.247,53.461 R30.2@53.247,53.925 53.247,54.55 ; R32.2@50.522,54.475 50.597,54.55 53.247,54.55 ; R34.2@50.522,55.575 51.512,55.575 51.642,55.705 52.704,55.705 53.234,55.175 R33.2@53.247,55.175 ; R33.2@53.272,55.15 R33.2@53.247,55.175 ; 53.247,54.55 R33.2@53.247,55.175
  Bottom Layer w0.2: DD1.39@35.08,59.01 35.082,58.11 35.082,57.823 ccw(c35.282,57.823) 35.208,57.637 v1(35.8,57.4)
  Bottom Layer w0.25: R2.1@27.52,52.432 27.532,52.432 28.71,53.61 DD1.23@30.88,53.61 32.167,53.61 32.289,53.732 v1(32.384,53.732) ; v1(30.08,44.31) 30.08,44.81 DD1.1@30.88,44.81 ; DD1.11@30.88,48.81 32.315,48.81 v1(32.35,48.775) ; DD1.17@30.88,51.21 31.755,51.21 31.88,51.21 cw(c31.88,50.935) 32.058,51.145 ; DD1.18@30.88,51.61 31.6,51.61 32.221,51.61 ccw(c32.22,51.86) v1(32.354,51.649) ; 32.058,51.145 cw(c31.898,50.952) 32.068,51.136 v1(32.35,50.875) ; DD1.36@33.88,59.01 33.88,60.58 v1(33.9,60.6) ; DD1.119@36.28,43.01 36.28,44.48 v1(36.3,44.5) ; v1(40.75,44.575) 40.817,44.508 41.096,44.508 41.48,44.124 DD1.106@41.48,43.01 ; DD1.54@41.08,59.01 41.08,57.841 41.2,57.721 41.2,57.325 41.508,57.017 42.108,57.017 v1(42.175,56.95) ; v1(41.45,60.6) 41.48,60.57 DD1.55@41.48,59.01 ; v1(45.288,55.898) v1(45.3,55.125) ; v1(45.288,55.898) 45.289,55.898 cw(c44.898,54.758) 45.686,55.67 ccw(c45.849,55.86) 45.849,55.61 DD1.69@46.88,55.61 ; v1@45.314,55.139 45.431,55.139 45.502,55.21 DD1.70@46.88,55.21 ; v1(45.425,45.275) 45.542,45.158 cw(c45.365,44.981) 45.61,45.031 ccw(c45.88,45.085) 45.88,44.81 46.005,44.81 DD1.96@46.88,44.81 ; v1(45.485,48.01) DD1.88@46.88,48.01 ; R33.2@53.272,55.15 v1(54.05,55.15)
  Bottom Layer w0.3: v1@31.9,60.025 31.9,60.015 32.44,59.475 32.525,59.475
  other v1: 42.125,48.05
  other v2: 18.5,57 19.5,57 20.5,57 18.5,58 19.5,58 20.5,58 18.5,59 19.5,59 20.5,59
+12: C37.2 C38.2 DA1.2 DA1.3 DA2.2 DA2.3 VD2.2 VT1.2 | length 1.9
  Bottom Layer w0.6: DA2.2@6.275,53.325 DA2.3@6.275,54.275 ; DA1.2@7.025,34.575 DA1.3@7.025,35.525
GND: C1.1 C2.1 C3.1 C4.1 C5.1 C6.1 C7.1 C8.1 C9.1 C10.1 C11.1 C12.1 C13.1 C14.1 C15.1 C16.1 C17.1 C18.1 C19.1 C20.1 C21.1 C22.1 C23.2 C24.1 C25.1 C26.1 C27.1 C28.1 C29.1 C30.1 C31.1 C32.2 C33.2 C34.2 C35.2 C36.2 C37.1 C38.1 C43.1 C44.1 C45.1 C46.1 C47.1 C48.1 DA1.4 DA2.4 DD1.12 DD1.118 DD1.129 R1.1 R3.2 R4.2 R5.1 R6.1 R7.1 R8.1 R9.1 R10.1 R11.1 R12.1 R13.1 R14.1 R15.1 R16.1 R17.1 R18.1 R24.1 R29.1 R31.1 R43.1 R45.1 R47.1 S1.2 VD1.1 XP1.2 XS2.13 XS4.13 ZQ1.2 ZQ1.4 | length 13.1
  Bottom Layer w0.15: 27.6,49.6 27.99,49.21 DD1.12@30.88,49.21 ; R13.1@38,62.697 38.03,62.727 38.03,63.75 ; R11.1@39.2,62.697 39.227,62.94 39.23,63.283 ccw(c39.005,63.285) 39.23,63.285 39.23,63.467 ; R29.1@50.522,53.225 50.752,53.455 51.205,53.455 v1(51.25,53.5)
  Bottom Layer w0.25: DD1.118@36.68,43.01 36.68,41.615 37.1,41.195 v1(37.1,41.1) ; v1(48.324,49.01) 49.215,49.01 ZQ1.4@49.225,49 49.5,49.275 49.5,50.275 C20.1@49.725,50.5 49.85,50.625 v1(50.425,50.625) ; C23.2@50.825,45.325 50.825,46.7 ZQ1.2@50.925,46.8
  other v1: 1.8,1.4 3.4,1.4 5,1.4 6.6,1.4 8.2,1.4 9.8,1.4 11.4,1.4 13,1.4 14.6,1.4 77,1.4 78.6,1.4 2.6,3 4.2,3 5.8,3 7.4,3 9,3 12.2,3 13.8,3 15.4,3 77.8,3 79.4,3 1.8,4.6 3.4,4.6 5,4.6 6.6,4.6 8.2,4.6 13,4.6 14.6,4.6 77,4.6 78.6,4.6 2.6,6.2 4.2,6.2 5.8,6.2 7.4,6.2 9,6.2 12.2,6.2 13.8,6.2 15.4,6.2 77.8,6.2 79.4,6.2 1.8,7.8 6.6,7.8 11.4,7.8 13,7.8 14.6,7.8 77,7.8 78.6,7.8 2.6,9.4 4.2,9.4 12.2,9.4 13.8,9.4 15.4,9.4 77.8,9.4 79.4,9.4 1.8,11 11.4,11 13,11 14.6,11 77,11 78.6,11 2.6,12.6 9,12.6 12.2,12.6 13.8,12.6 15.4,12.6 79.4,12.6 1.8,14.2 8.2,14.2 9.8,14.2 11.4,14.2 13,14.2 14.6,14.2 2.6,15.8 9,15.8 10.6,15.8 12.2,15.8 13.8,15.8 15.4,15.8 1.8,17.4 8.2,17.4 9.8,17.4 11.4,17.4 13,17.4 14.6,17.4 78.6,17.4 9,19 15.4,19 77.8,19 79.4,19 8.2,20.6 9.8,20.6 77,20.6 78.6,20.6 2.6,22.2 9,22.2 10.6,22.2 12.2,22.2 13.8,22.2 15.4,22.2 77.8,22.2 79.4,22.2 1.8,23.8 3.4,23.8 5,23.8 11.4,23.8 13,23.8 14.6,23.8 77,23.8 78.6,23.8 2.6,25.4 10.6,25.4 12.2,25.4 13.8,25.4 15.4,25.4 77.8,25.4 79.4,25.4 11.4,27 13,27 14.6,27 77,27 78.6,27 10.6,28.6 12.2,28.6 13.8,28.6 15.4,28.6 58.6,28.6 77.8,28.6 79.4,28.6 6.6,30.2 8.2,30.2 9.8,30.2 11.4,30.2 13,30.2 14.6,30.2 21,30.2 32.2,30.2 40.2,30.2 53,30.2 77,30.2 78.6,30.2 15.4,31.8 31.4,31.8 57,31.8 58.6,31.8 77.8,31.8 79.4,31.8 8.2,33.4 14.6,33.4 21,33.4 24.2,33.4 27.4,33.4 30.6,33.4 77,33.4 78.6,33.4 15.4,35 17,35 20.2,35 21.8,35 28.2,35 49,35 63.4,35 79.4,35 14.6,36.6 21,36.6 22.6,36.6 27.4,36.6 75.4,36.6 78.6,36.6 9,38.2 12.2,38.2 13.8,38.2 20.2,38.2 21.8,38.2 23.4,38.2 28.2,38.2 57,38.2 77.8,38.2 79.4,38.2 6.6,39.8 16.2,39.8 17.8,39.8 22.6,39.8 24.2,39.8 33.8,39.8 77,39.8 78.6,39.8 5.8,41.4 9,41.4 15.4,41.4 76.2,41.4 77.8,41.4 79.4,41.4 3.4,43 5,43 8.2,43 75.4,43 77,43 78.6,43 2.6,44.6 4.2,44.6 5.8,44.6 9,44.6 76.2,44.6 3.4,46.2 5,46.2 8.2,46.2 13,46.2 14.6,46.2 16.2,46.2 17.8,46.2 19.4,46.2 21,46.2 38.6,46.2 75.4,46.2 77,46.2 52.275,47.475 2.6,47.8 4.2,47.8 5.8,47.8 7.4,47.8 9,47.8 10.6,47.8 15.4,47.8 17,47.8 18.6,47.8 20.2,47.8 21.8,47.8 23.4,47.8 33,47.8 34.6,47.8 76.2,47.8 77.8,47.8 79.4,47.8 51.85,47.9 52.25,49 37.25,49.25 38.88,49.25 40.5,49.25 3.4,49.4 11.4,49.4 13,49.4 14.6,49.4 16.2,49.4 17.8,49.4 19.4,49.4 21,49.4 22.6,49.4 75.4,49.4 77,49.4 78.6,49.4 7.4,51 12.2,51 13.8,51 15.4,51 17,51 18.6,51 20.2,51 21.8,51 23.4,51 25,51 37.25,51 38.88,51.01 40.5,51 76.2,51 77.8,51 79.4,51 13,52.6 19.4,52.6 21,52.6 22.6,52.6 24.2,52.6 25.8,52.6 75.4,52.6 77,52.6 37.25,52.75 38.88,52.75 40.5,52.75 18.6,54.2 20.2,54.2 21.8,54.2 23.4,54.2 25,54.2 26.6,54.2 28.2,54.2 8.2,55.8 9.8,55.8 19.4,55.8 21,55.8 22.6,55.8 24.2,55.8 25.8,55.8 27.4,55.8 29,55.8 35.4,55.8 78.6,55.8 10.6,57.4 23.4,57.4 25,57.4 26.6,57.4 28.2,57.4 34.6,57.4 79.4,57.4 1.8,59 5,59 9.8,59 25.8,59 27.4,59 29,59 30.6,59 48.2,59 51.4,59 75.4,59 77,59 78.6,59 2.6,60.6 4.2,60.6 5.8,60.6 7.4,60.6 10.6,60.6 17,60.6 20.2,60.6 26.6,60.6 28.2,60.6 29.8,60.6 33,60.6 36.2,60.6 42.6,60.6 45.8,60.6 47.4,60.6 49,60.6 50.6,60.6 52.2,60.6 76.2,60.6 77.8,60.6 79.4,60.6 1.8,62.2 3.4,62.2 5,62.2 6.6,62.2 9.8,62.2 22.6,62.2 29,62.2 30.6,62.2 32.2,62.2 33.8,62.2 43.4,62.2 48.2,62.2 49.8,62.2 51.4,62.2 2.6,63.8 4.2,63.8 5.8,63.8 7.4,63.8 10.6,63.8 23.4,63.8 42.6,63.8 44.2,63.8 45.8,63.8 47.4,63.8 49,63.8 50.6,63.8 52.2,63.8 1.8,65.4 3.4,65.4 5,65.4 6.6,65.4 8.2,65.4 9.8,65.4 11.4,65.4 13,65.4 22.6,65.4 24.2,65.4 25.8,65.4 41.8,65.4 43.4,65.4 45,65.4 46.6,65.4 48.2,65.4 49.8,65.4 51.4,65.4
GND_ETH: C31.2 R31.2 XS1.0 XS2.0 XS3.0 XS4.0 | length 1.6
  Bottom Layer w0.25: 73.25,38.5 R31.2@74.85,38.5
NetC20_2: C20.2 DD1.89 ZQ1.1 | length 6.3
  Bottom Layer w0.25: DD1.89@46.88,47.61 48.081,47.61 ccw(c48.081,47.86) 48.258,47.683 48.477,47.902 cw(c48.654,47.725) 48.654,47.975 49.896,47.975 ccw(c49.896,48.225) 50.073,48.048 50.45,48.425 ZQ1.1@50.925,49 51.325,49.4 C20.2@51.325,50.5
NetC23_1: C23.1 DD1.90 ZQ1.3 | length 4
  Bottom Layer w0.25: DD1.90@46.88,47.21 48.75,47.21 ZQ1.3@49.225,46.8 C23.1@49.225,45.325
NetC25_2: C25.2 DD1.91 R19.1 S1.1 | length 48.4
  Top Layer w0.15: v1(44.825,46.975) 44.85,47 45.903,47 R19.1@45.928,47.025
  Layer 2 w0.15: v1(44.825,46.975) 44.825,45.075 45.503,44.397 66.447,44.397 v1(75.9,53.85)
  Bottom Layer w0.15: v1(44.825,46.975) 45.5,46.975 45.665,46.81 DD1.91@46.88,46.81 ; S1.1@73.95,53.85 v1(75.9,53.85) S1.1@78.45,53.85 78.45,55.15 78.125,55.475 77.675,55.475 77.35,55.8 C25.2@77.35,56.65
NetC32_1: C32.1 XS1.1 XS1.6 XS1.7 XS1.12 | length 20
  Top Layer w0.25: XS1.1@69.08,39.85 71.55,39.85 C32.1@71.7,40
  Layer 2 w0.25: XS1.12@57.86,37.31 57.86,38.83 XS1.6@58.88,39.85 60.355,41.325 67.605,41.325 XS1.1@69.08,39.85 70.1,38.83 XS1.7@70.1,37.31
NetC33_1: C33.1 XS2.1 XS2.6 XS2.7 XS2.12 | length 20.1
  Top Layer w0.25: XS2.6@71.08,26.42 73.62,26.42 C33.1@73.7,26.5
  Layer 2 w0.25: XS2.7@59.86,28.96 59.86,27.44 XS2.1@60.88,26.42 62.425,24.875 69.535,24.875 XS2.6@71.08,26.42 72.1,27.44 XS2.12@72.1,28.96
NetC34_1: C34.1 XS3.1 XS3.6 XS3.7 XS3.12 | length 19.8
  Top Layer w0.25: XS3.6@51.33,26.42 53.62,26.42 C34.1@53.7,26.5
  Layer 2 w0.25: XS3.7@40.11,28.96 40.11,27.44 XS3.1@41.13,26.42 42.725,24.825 49.735,24.825 XS3.6@51.33,26.42 52.35,27.44 XS3.12@52.35,28.96
NetC35_1: C35.1 XS4.1 XS4.6 XS4.7 XS4.12 | length 20.1
  Top Layer w0.25: XS4.6@31.58,26.42 34.12,26.42 C35.1@34.2,26.5
  Layer 2 w0.25: XS4.7@20.36,28.96 20.36,27.44 XS4.1@21.38,26.42 22.975,24.825 29.985,24.825 XS4.6@31.58,26.42 32.6,27.44 XS4.12@32.6,28.96
NetC36_1: C36.1 VD1.2 VT1.3 XP1.1
NetC39_1: C39.1 DA1.6 | length 2.3
  Bottom Layer w0.3: DA1.6@9.225,33.625 9.249,33.601 9.249,33.001 9.825,32.425 C39.1@9.825,31.575
NetC39_2: C39.2 DA1.5 L1.1
NetC40_1: C40.1 DA2.6 | length 2.4
  Bottom Layer w0.3: C40.1@8.325,50.075 8.325,52.225 DA2.6@8.475,52.375
NetC40_2: C40.2 DA2.5 L2.1
NetC41_1: C41.1 DA2.1 R46.1 R47.2 | length 5.9
  Bottom Layer w0.3: C41.1@2.725,51.3 2.875,51.45 R46.1@4.225,51.45 4.35,51.575 5.349,51.575 ; R47.2@5.225,50.075 5.349,50.4 5.349,51.575 ; DA2.1@6.275,52.375 6.275,51.751 6.099,51.575 5.349,51.575
NetC41_2: C41.2 C44.2 C46.2 C48.2 L2.2 R46.2 SB2.2 | length 15
  Top Layer w0.3: v1(3.95,53.6) 9.3,53.6 v1(14.225,58.525)
  Bottom Layer w0.3: C41.2@2.725,52.9 2.8,52.9 3.1,53.2 3.1,53.275 3.425,53.6 v1(3.95,53.6) 3.95,53 4.2,52.75 R46.2@4.225,52.75 ; v1(14.225,58.525) 14.225,58.425 v1@14.25,58.4
NetC42_1: C42.1 DA1.1 R44.1 R45.2 | length 5.3
  Bottom Layer w0.3: C42.1@3.775,32.4 5.125,32.4 R44.1@5.275,32.55 6.975,32.55 ; R45.2@6.975,31.575 6.975,32.55 ; DA1.1@7.025,33.625 6.975,33.425 6.975,32.55
NetC42_2: C42.2 C43.2 C45.2 C47.2 L1.3 R44.2 SB1.2 | length 13.7
  Top Layer w0.3: v1(4.858,34.738) v1(12.675,42.975)
  Bottom Layer w0.3: C42.2@3.775,34 4.858,34 v1(4.858,34.738) ; R44.2@4.95,34.1 5.2,33.85 R44.2@5.275,33.85 ; v1(12.675,42.975) 12.675,43 v1@12.7,43.025
NetDD1_13: DD1.13 R1.2 | length 3.4
  Bottom Layer w0.15: R1.2@27.95,50.7 27.95,50.625 28.275,50.3 28.35,50.3 29.04,49.61 DD1.13@30.88,49.61
NetDD1_20: DD1.20 R2.2 | length 2.2
  Bottom Layer w0.15: R2.2@28.714,52.432 28.736,52.41 DD1.20@30.88,52.41
NetDD1_40: DD1.40 R3.1 | length 2.5
  Bottom Layer w0.15: R3.1@35.4,61.503 35.4,61.103 35.48,61.023 35.48,60.418 ; DD1.40@35.48,59.01 35.481,60.417
NetDD1_46: DD1.46 R4.1 | length 3.3
  Bottom Layer w0.15: R4.1@36.8,61.503 36.8,60.6 37.115,60.285 37.719,60.285 37.88,60.124 DD1.46@37.88,59.01
NetDD1_47: DD1.47 R14.2 | length 4.9
  Bottom Layer w0.15: R14.2@37.5,63.403 37.42,63.323 37.42,60.872 37.607,60.685 37.885,60.685 38.28,60.29 DD1.47@38.28,59.01
NetDD1_48: DD1.48 R13.2 | length 2.8
  Bottom Layer w0.15: R13.2@38,61.503 38.143,61.36 38.143,60.993 38.68,60.455 38.68,60.124 DD1.48@38.68,59.01
NetDD1_49: DD1.49 R12.2 | length 4.8
  Bottom Layer w0.15: R12.2@38.7,63.603 38.6,63.503 38.6,61.175 38.6,61.066 39.08,60.586 DD1.49@39.08,59.01
NetDD1_50: DD1.50 R11.2 | length 2.6
  Bottom Layer w0.15: R11.2@39.2,61.503 39.38,61.323 39.38,60.851 39.48,60.751 DD1.50@39.48,59.01
NetDD1_51: DD1.51 R10.2 | length 4.7
  Bottom Layer w0.15: DD1.51@39.88,59.01 39.88,59.225 39.88,60.917 39.82,60.977 39.82,63.523 R10.2@39.9,63.603
NetDD1_52: DD1.52 R9.2 | length 2.5
  Bottom Layer w0.15: DD1.52@40.28,59.01 40.28,60.538 40.4,60.658 R9.2@40.4,61.503
NetDD1_56: DD1.56 R8.2 | length 2.7
  Bottom Layer w0.15: R8.2@41.6,61.503 41.801,61.302 41.801,60.991 41.975,60.817 41.975,60.383 41.88,60.288 DD1.56@41.88,59.01
NetDD1_62: DD1.62 R7.2 | length 3.9
  Bottom Layer w0.15: DD1.62@44.28,59.01 44.28,62.9 R7.2@44.303,62.9
NetDD1_63: DD1.63 R6.2 | length 2.7
  Bottom Layer w0.15: DD1.63@44.68,59.01 44.68,60.124 45.128,60.572 R6.2@45.128,61.525
NetDD1_64: DD1.64 R5.2 | length 1.3
  Bottom Layer w0.15: DD1.64@45.08,59.01 45.08,59.3 R5.2@46.078,59.3
NetDD1_65: DD1.65 R15.2 | length 2.9
  Bottom Layer w0.15: DD1.65@46.88,57.21 47.092,57.21 47.142,57.26 47.142,57.472 47.765,58.095 47.769,58.095 47.999,58.325 R15.2@49.178,58.325
NetDD1_66: DD1.66 R16.2 | length 5.5
  Bottom Layer w0.15: DD1.66@46.88,56.81 48.174,56.81 48.914,57.55 R16.2@52.075,57.55
NetDD1_67: DD1.67 R17.2 | length 2.4
  Bottom Layer w0.15: DD1.67@46.88,56.41 46.93,56.46 47.968,56.46 48.008,56.5 48.43,56.5 48.705,56.775 R17.2@49.178,56.775
NetDD1_68: DD1.68 R18.2 | length 5.3
  Bottom Layer w0.15: DD1.68@46.88,56.01 46.93,56.06 47.993,56.06 48.133,56.2 50.969,56.2 51.144,56.375 R18.2@52.053,56.375
NetDD1_72: DD1.72 R34.1 | length 3
  Bottom Layer w0.15: DD1.72@46.88,54.41 46.93,54.46 47.997,54.46 48.405,54.868 48.405,54.988 48.762,55.345 49.098,55.345 R34.1@49.328,55.575
NetDD1_73: DD1.73 R33.1 | length 5.7
  Bottom Layer w0.15: DD1.73@46.88,54.01 46.93,54.06 48.022,54.06 48.705,54.743 48.705,54.863 48.887,55.045 50.933,55.045 51.063,55.175 R33.1@52.053,55.175
NetR35_2: R35.2 XS1.16 | length 2.8
  Top Layer w0.15: R35.2@55.325,35.378 55.325,35.366 55.555,35.136 55.567,35.136 55.933,34.77 XS1.16@57.86,34.77
NetR36_2: R36.2 XS2.16 | length 2.3
  Top Layer w0.15: XS2.16@72.1,31.5 R36.2@72.1,33.798
NetR37_2: R37.2 XS3.16 | length 2.5
  Top Layer w0.15: XS3.16@52.35,31.5 52.35,33.753 R37.2@52.5,33.903
NetR38_2: R38.2 XS4.16 | length 2.4
  Top Layer w0.15: R38.2@32.5,33.903 32.6,33.803 XS4.16@32.6,31.5
NetR39_2: R39.2 XS1.14 | length 2.1
  Top Layer w0.15: R39.2@65.497,34.8 65.527,34.77 XS1.14@67.56,34.77
NetR40_2: R40.2 XS2.14 | length 1.9
  Top Layer w0.15: R40.2@61.8,33.103 61.8,32.311 62.4,31.711 XS2.14@62.4,31.5
NetR41_2: R41.2 XS3.14 | length 2.5
  Top Layer w0.15: R41.2@42.5,33.903 42.575,33.828 42.575,31.575 XS3.14@42.65,31.5
NetR42_2: R42.2 XS4.14 | length 2.4
  Top Layer w0.15: XS4.14@22.9,31.5 22.9,33.803 R42.2@23,33.903
NetR43_2: R43.2 VD2.1 VT1.1 | length 4.2
  Bottom Layer w0.3: VD2.1@3,26.795 4.85,26.795 R43.2@4.85,25.75 ; 4.85,26.709 5.288,27.147 ccw(c5.075,27.358) 5.375,27.358 VT1.1@5.375,27.8
P0A_N: DD1.98 XS1.10 | length 41.4
  Bottom Layer w0.158: DD1.98@44.68,43.01 44.68,42.061 ccw(c44.838,42.061) 44.704,41.978 ; 44.704,41.977 44.76,41.888 ccw(c44.954,42.01) 44.954,41.781 45.206,41.781 ccw(c45.206,42.01) 45.435,42.01 45.435,42.045 cw(c45.593,42.045) 45.513,42.181 45.602,42.27 45.615,42.27 45.705,42.36 45.786,42.441 cw(c47.582,40.645) 47.582,43.185 59.879,43.185 67.312,43.185 67.314,43.185 cw(c67.315,40.392) 69.292,42.366 cw(c67.017,40.096) 69.293,42.364 cw(c67.017,40.096) 70.23,40.096 70.23,39.402 cw(c69.735,39.402) 70.085,39.052 70.084,39.051 cw(c69.088,40.049) 69.088,38.639 66.371,38.639 66.306,38.639 ccw(c66.306,38.481) 66.305,38.639 ccw(c66.339,36.359) 65.563,38.503 65.37,38.412 ccw(c66.604,36.304) 64.883,38.038 ; XS1.10@61.94,37.31 ccw(c61.94,36.366) 61.273,37.034 61.074,36.835 61.074,36.726 ccw(c61.521,36.726) 61.205,36.41 ccw(c61.567,36.772) 61.567,36.26 62.071,36.26 ccw(c62.071,38.756) 63.823,36.978 ccw(c62.071,38.756) 63.824,36.979 64.883,38.038
P0A_P: DD1.97 XS1.11 | length 41.6
  Bottom Layer w0.158: DD1.97@45.08,43.01 45.127,42.442 45.271,42.442 ccw(c45.271,42.6) 45.383,42.488 45.544,42.649 cw(c47.582,40.61) 45.545,42.65 cw(c47.582,40.61) 47.582,43.493 50.722,43.493 59.879,43.493 67.339,43.493 67.342,43.493 cw(c67.342,40.403) 69.53,42.585 cw(c67.083,40.146) 70.538,40.146 70.538,39.362 cw(c69.803,39.362) 70.323,38.842 cw(c69.085,40.08) 69.087,38.33 cw(c69.085,40.08) 69.085,38.33 66.343,38.33 66.335,38.33 ccw(c66.393,36.477) 65.909,38.266 65.772,38.229 ccw(c66.02,37.31) 65.499,38.107 65.38,38.029 ccw(c66.393,36.477) 65.083,37.788 64.073,36.778 cw(c62.071,38.791) 64.072,36.777 cw(c62.071,38.791) 62.071,35.952 61.567,35.952 cw(c61.567,36.772) 60.987,36.192 cw(c61.521,36.726) 60.766,36.726 60.766,36.835 60.567,37.034 ccw(c59.9,36.366) XS1.11@59.9,37.31
P0B_N: DD1.100 XS1.5 | length 42.3
  Bottom Layer w0.158: DD1.100@43.88,43.01 43.88,41.996 ccw(c44.037,41.996) 43.926,41.885 43.926,41.751 ccw(c44.632,41.751) 44.133,41.252 ccw(c44.559,41.678) 44.559,41.076 45.63,41.076 ccw(c45.63,42.648) 46.742,41.537 47.106,41.901 cw(c48.155,40.852) 48.155,42.335 54.205,42.335 55.537,42.335 cw(c55.537,42.129) 55.743,42.129 55.743,41.745 ccw(c56.257,41.745) 56.771,41.745 56.771,42.363 cw(c56.977,42.363) 57.183,42.363 57.183,41.745 ccw(c57.697,41.745) 58.211,41.745 58.211,42.363 cw(c58.417,42.363) 58.623,42.363 58.623,41.745 ccw(c59.137,41.745) 59.651,41.745 59.651,42.363 cw(c59.857,42.363) 60.063,42.363 60.063,41.745 ccw(c60.577,41.745) 61.091,41.745 61.091,42.129 cw(c61.297,42.129) 61.297,42.335 61.53,42.335 67.608,42.335 cw(c67.608,41.738) 68.03,42.16 68.03,41.943 cw(c67.872,41.943) 67.872,41.785 63.301,41.785 ; XS1.5@60.92,39.85 61.69,40.62 ccw(c61.578,40.731) 61.736,40.731 61.736,40.957 cw(c62.044,40.957) 61.826,41.175 cw(c63.299,39.702) 63.299,41.785
P0B_P: DD1.99 XS1.4 | length 42.4
  Bottom Layer w0.158: DD1.99@44.28,43.01 44.28,41.996 cw(c44.123,41.996) 44.234,41.885 44.234,41.751 ccw(c44.632,41.751) 44.35,41.47 ccw(c44.559,41.678) 44.559,41.384 45.63,41.384 ccw(c45.63,42.648) 46.524,41.754 46.888,42.118 cw(c48.155,40.852) 48.155,42.643 54.205,42.643 55.537,42.643 cw(c55.537,42.129) 56.051,42.129 56.051,41.745 ccw(c56.257,41.745) 56.463,41.745 56.463,42.363 cw(c56.977,42.363) 57.491,42.363 57.491,41.745 ccw(c57.697,41.745) 57.903,41.745 57.903,42.363 cw(c58.417,42.363) 58.931,42.363 58.931,41.745 ccw(c59.137,41.745) 59.343,41.745 59.343,42.363 cw(c59.857,42.363) 60.371,42.363 60.371,41.745 ccw(c60.577,41.745) 60.783,41.745 60.783,42.129 cw(c61.297,42.129) 61.297,42.643 61.53,42.643 67.608,42.643 cw(c67.608,41.738) 68.248,42.378 cw(c68.03,42.16) 68.338,42.16 68.338,41.943 cw(c67.872,41.943) 67.872,41.477 63.301,41.477 ; XS1.4@62.96,39.85 62.276,40.534 62.09,40.72 cw(c62.202,40.832) 62.044,40.832 62.044,40.891 cw(c62.202,40.89) 62.094,41.006 cw(c63.303,39.693) 63.299,41.477